# Altium PCB Core.PcbDoc (part 1 of 4)
Units mil, origin at the board's own origin, x right, y up, seen from the top; angles counter-clockwise.
Board outline 3055.22 x 2665.85 mil, 4 copper layers (Top Layer, Layer 1, Layer 2, Bottom Layer), stack 61.583 mil thick; 290 components, 231 nets, 1079 pads, 581 vias.
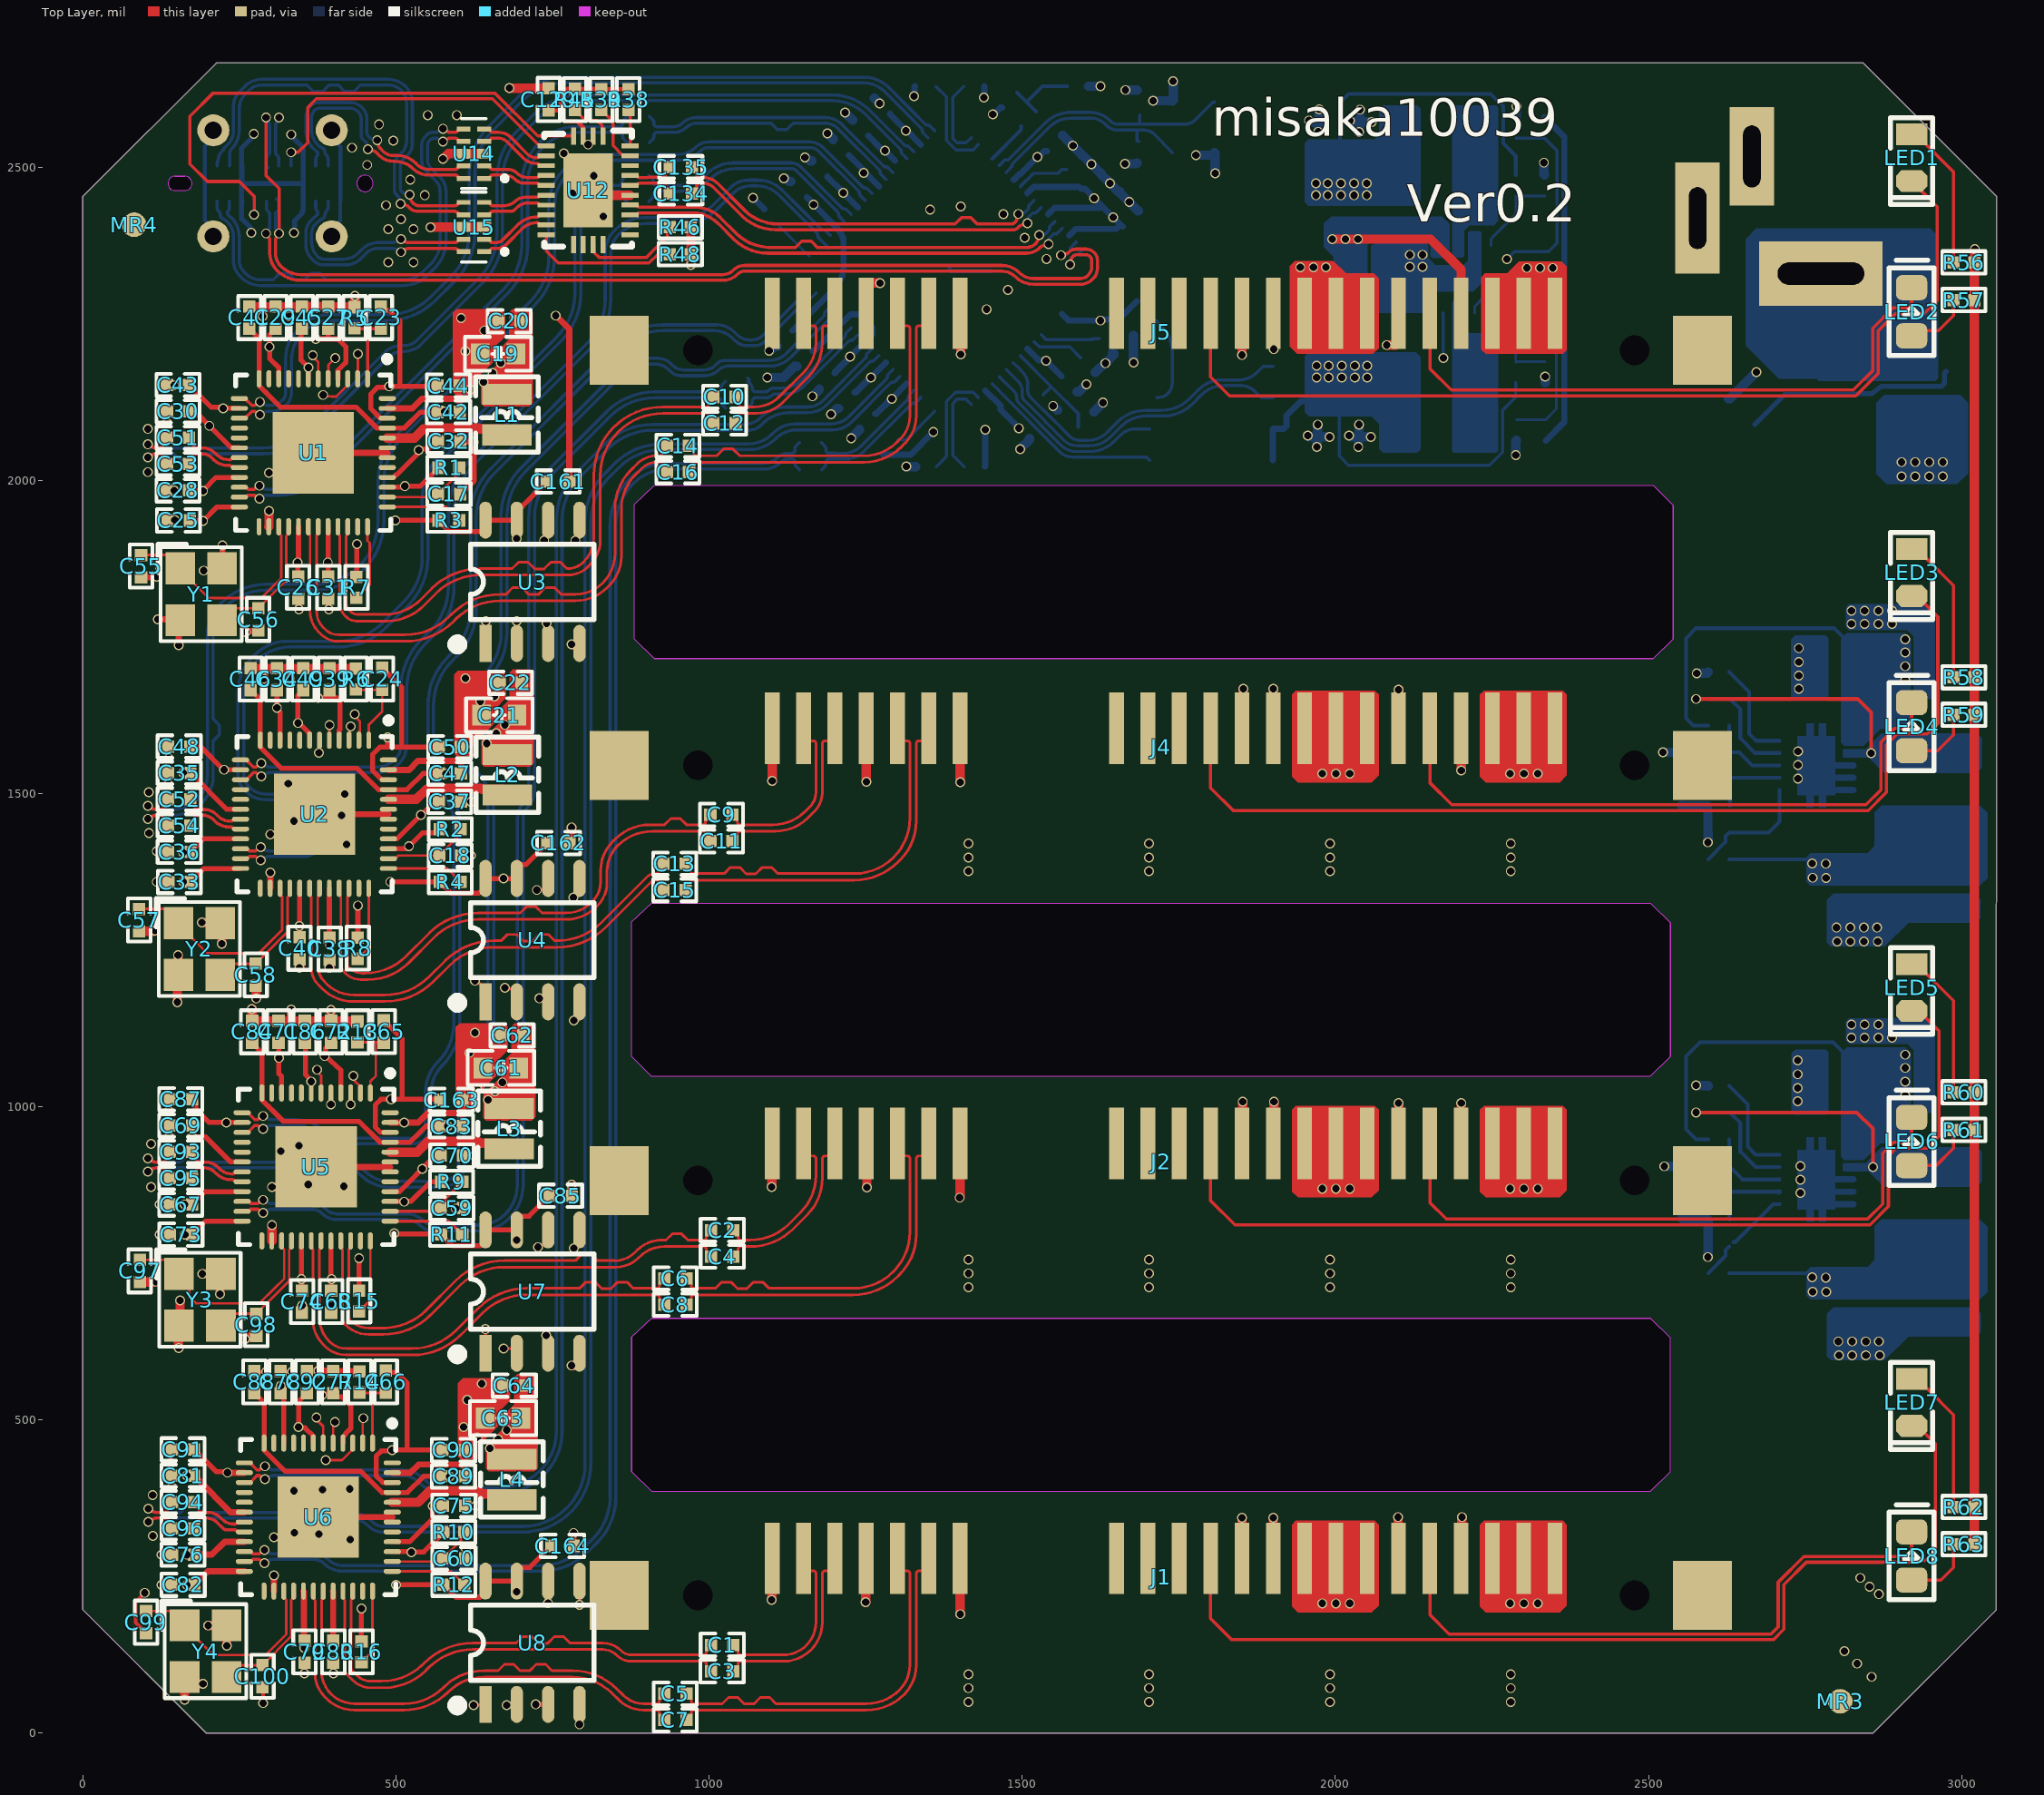
[diagram p0: Top Layer view]
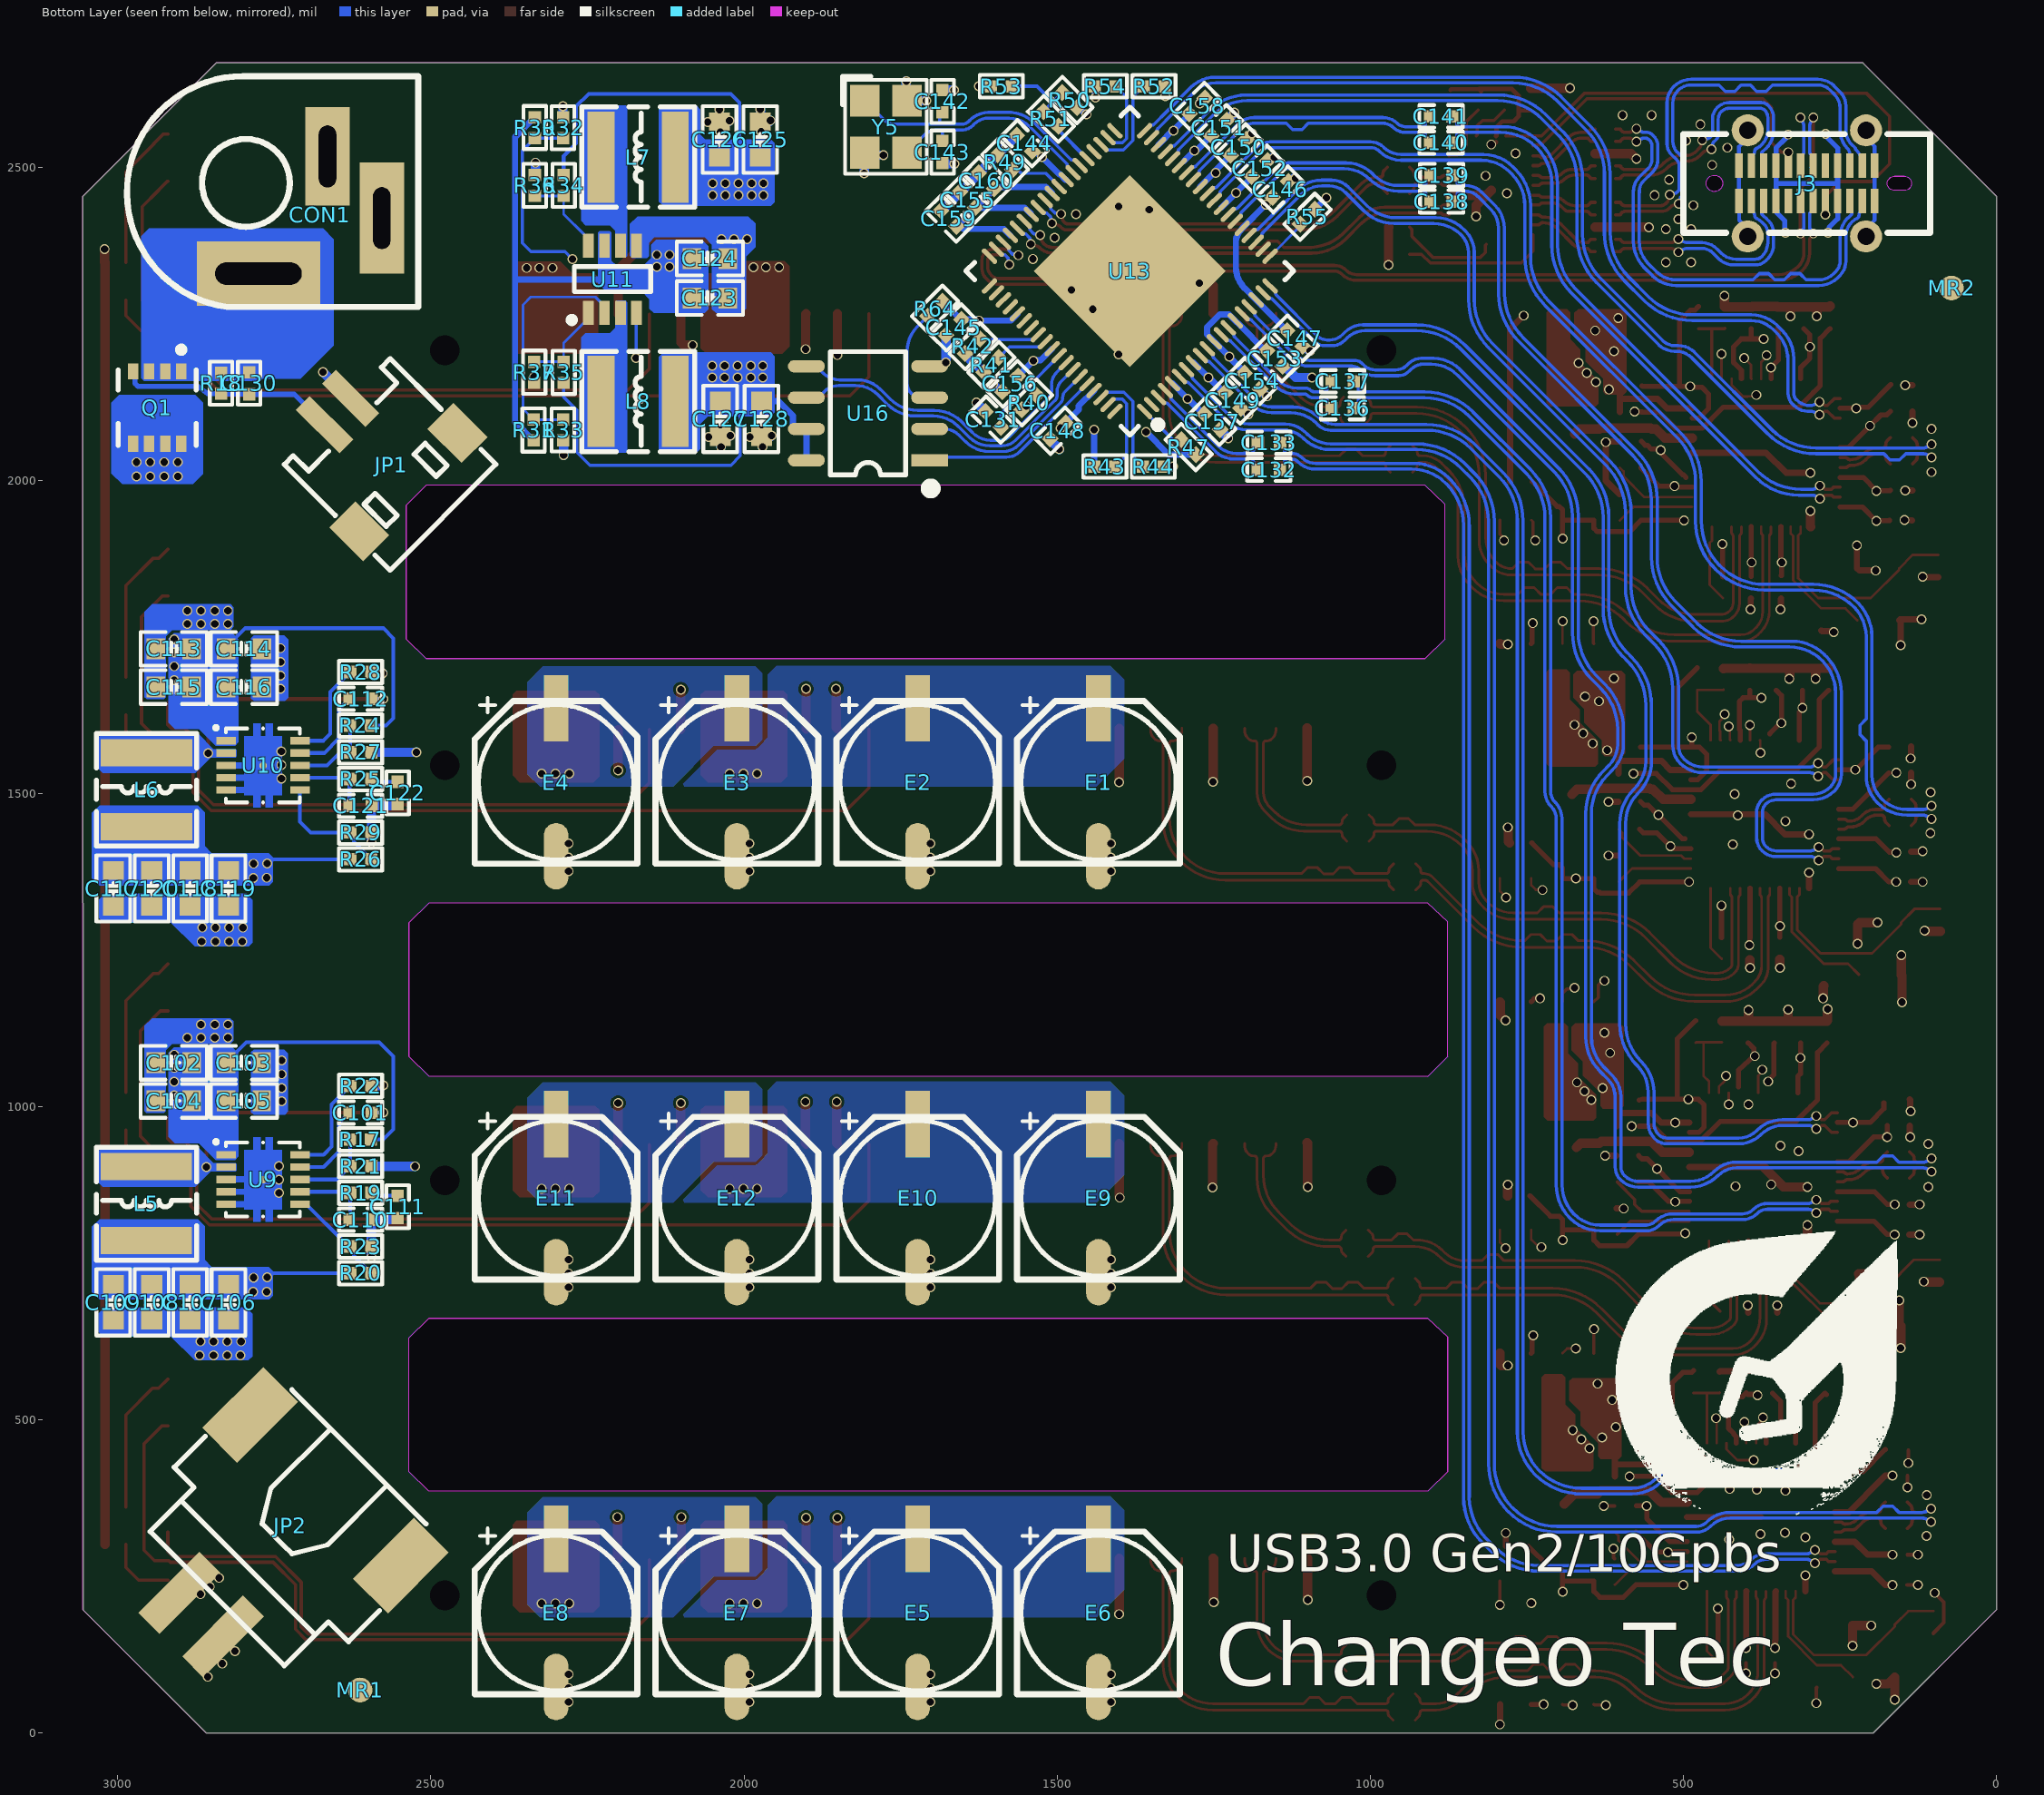
[diagram p1: Bottom Layer view, seen from below]
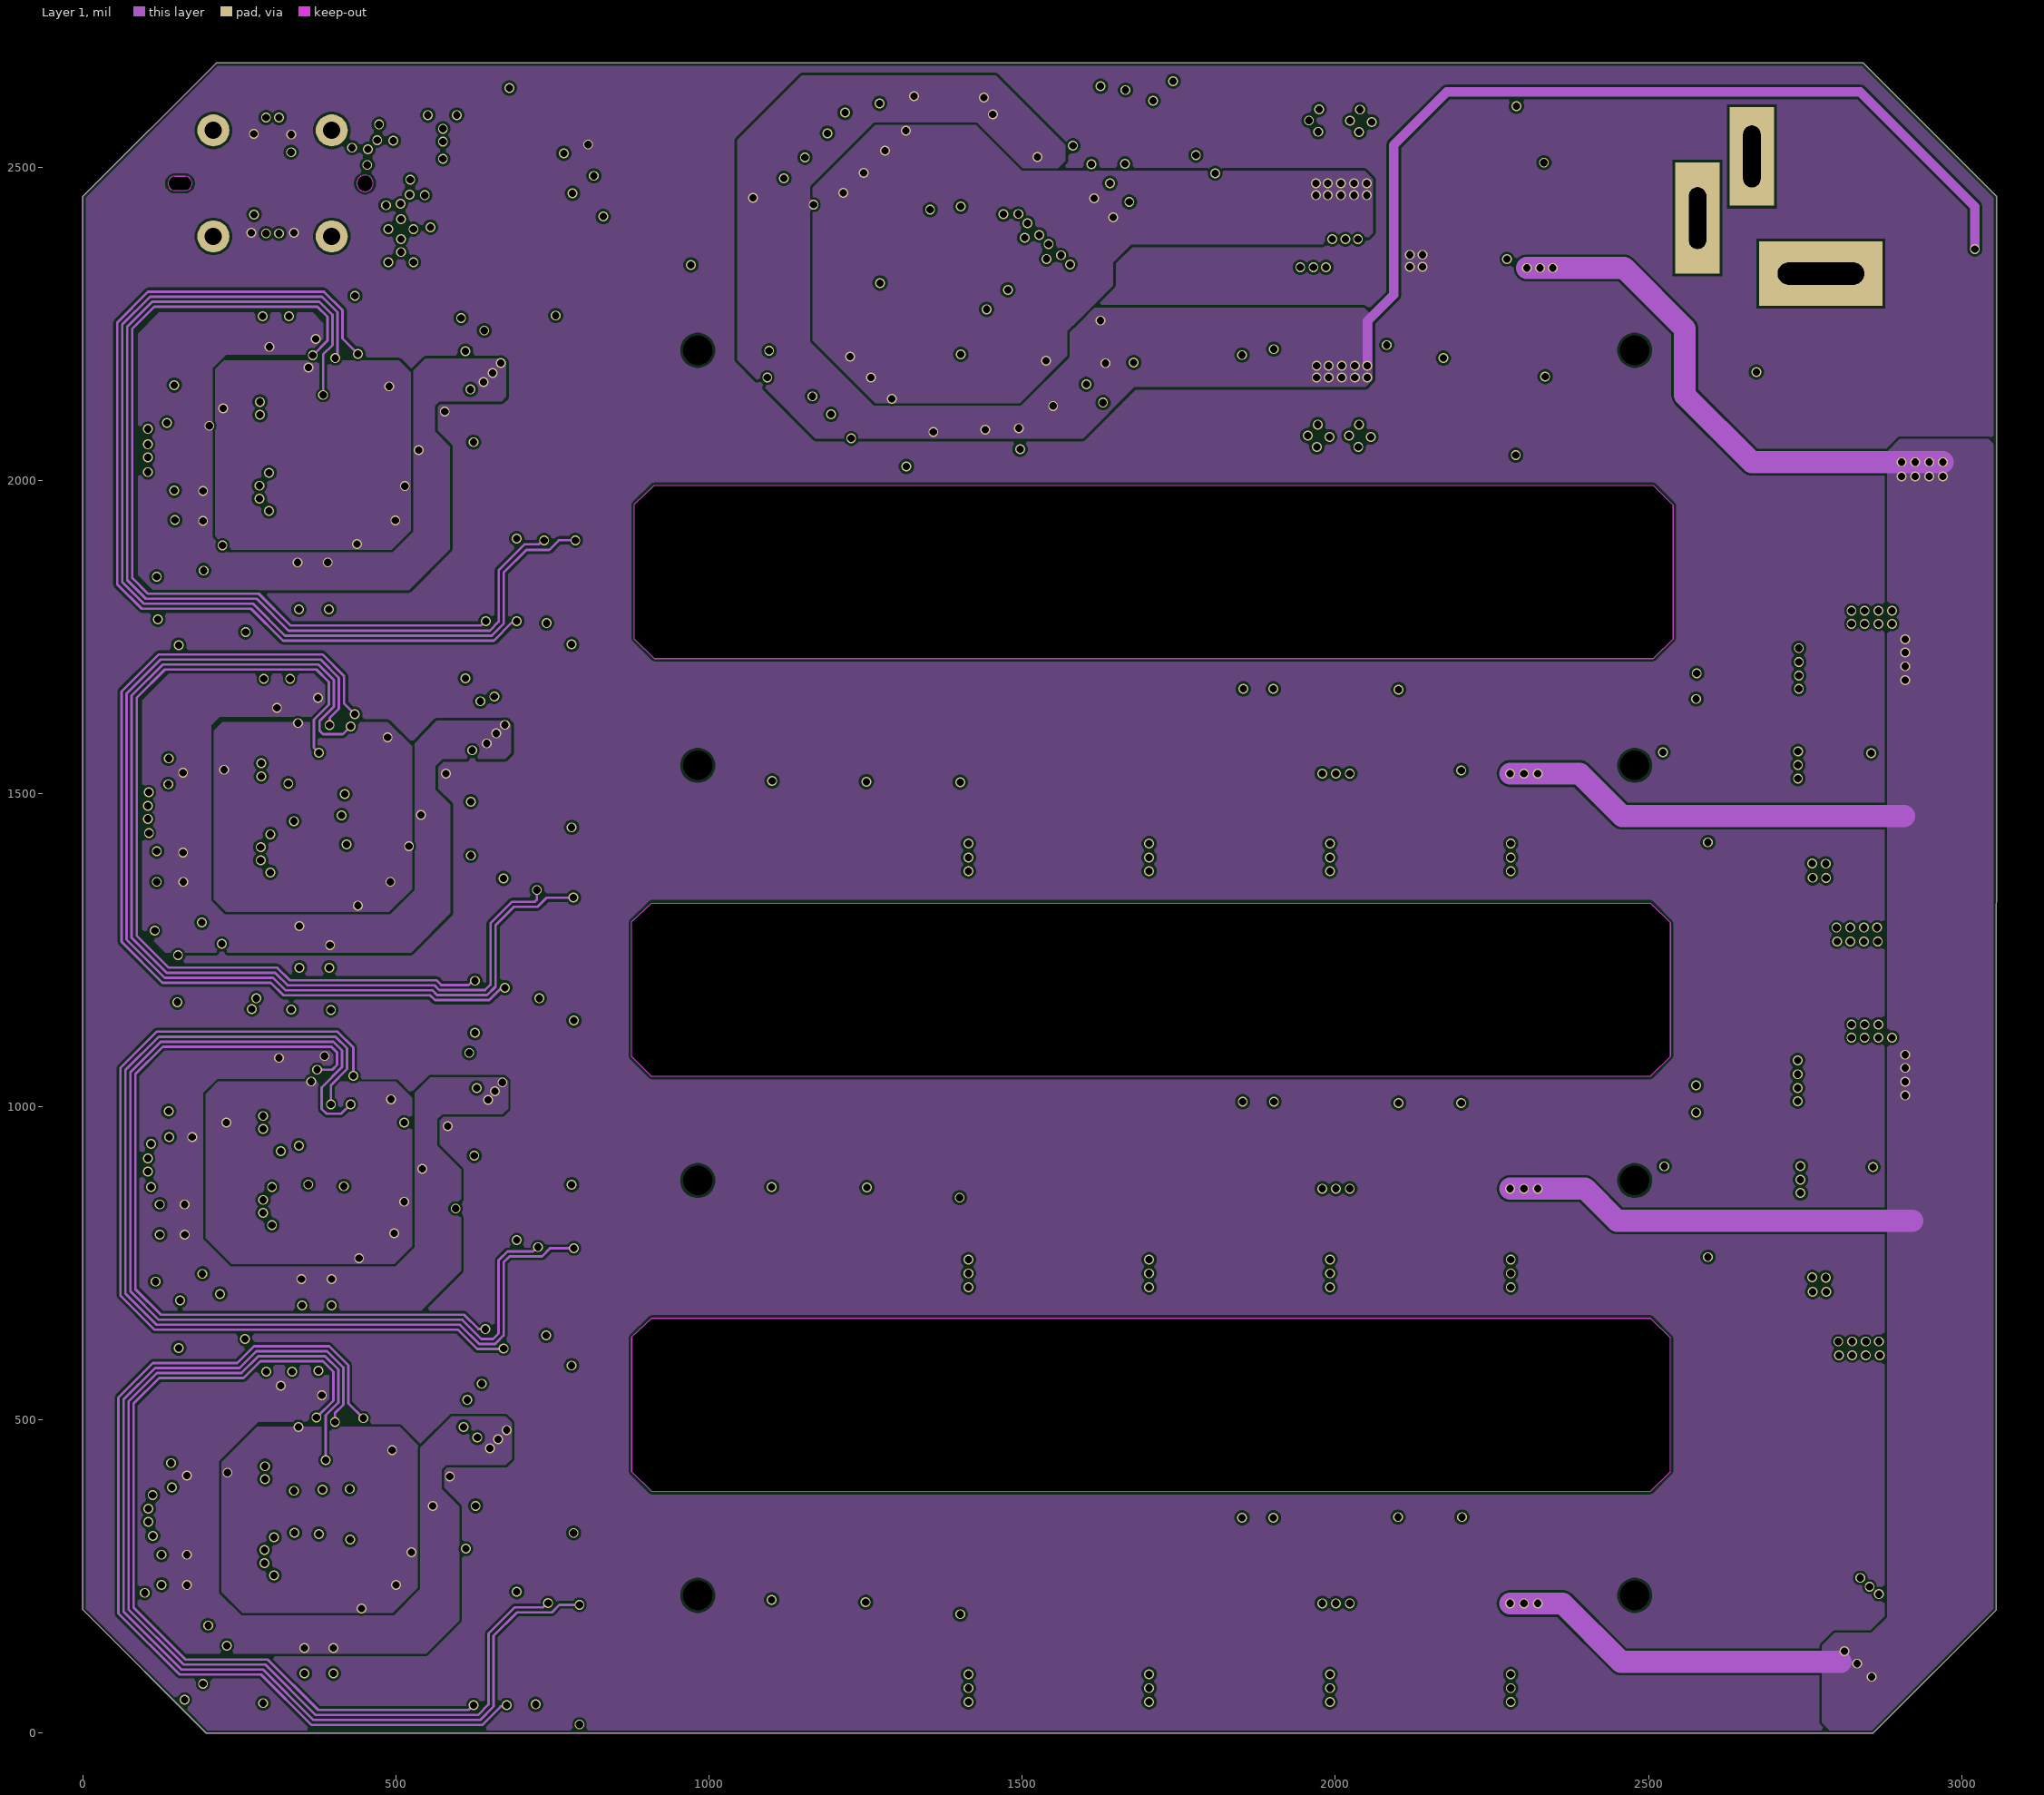
[diagram p2: Layer 1]
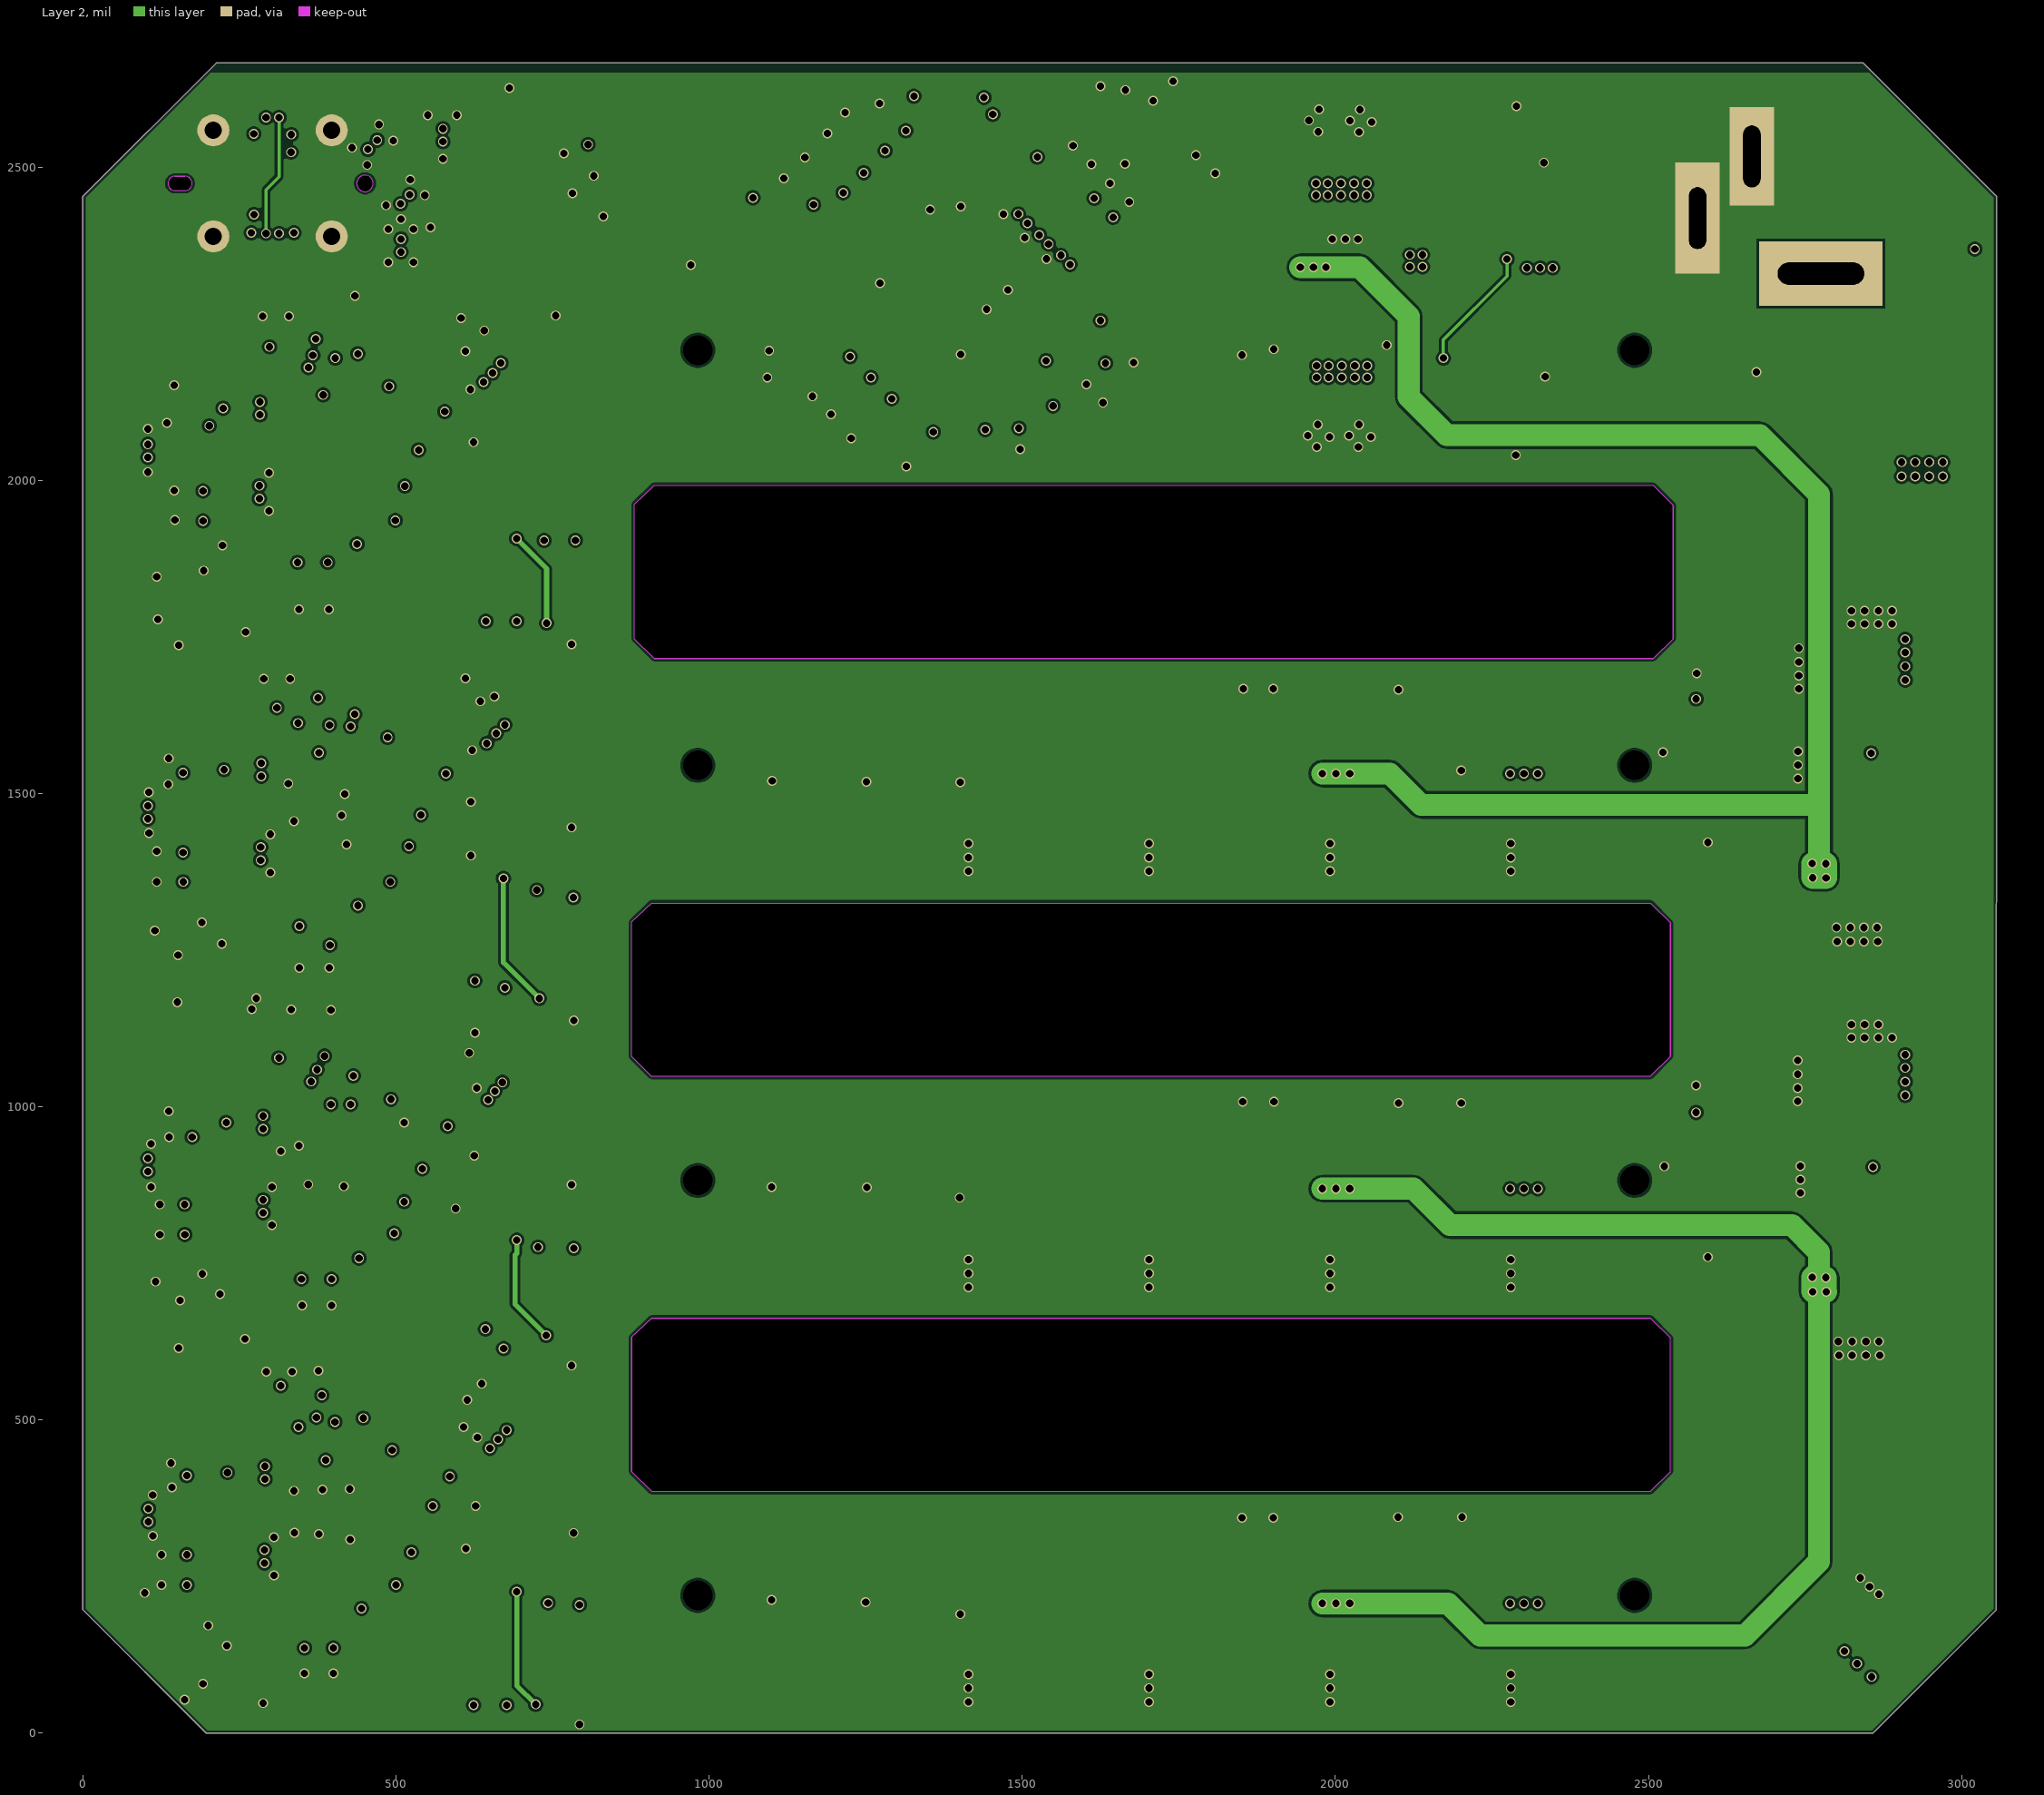
[diagram p3: Layer 2]
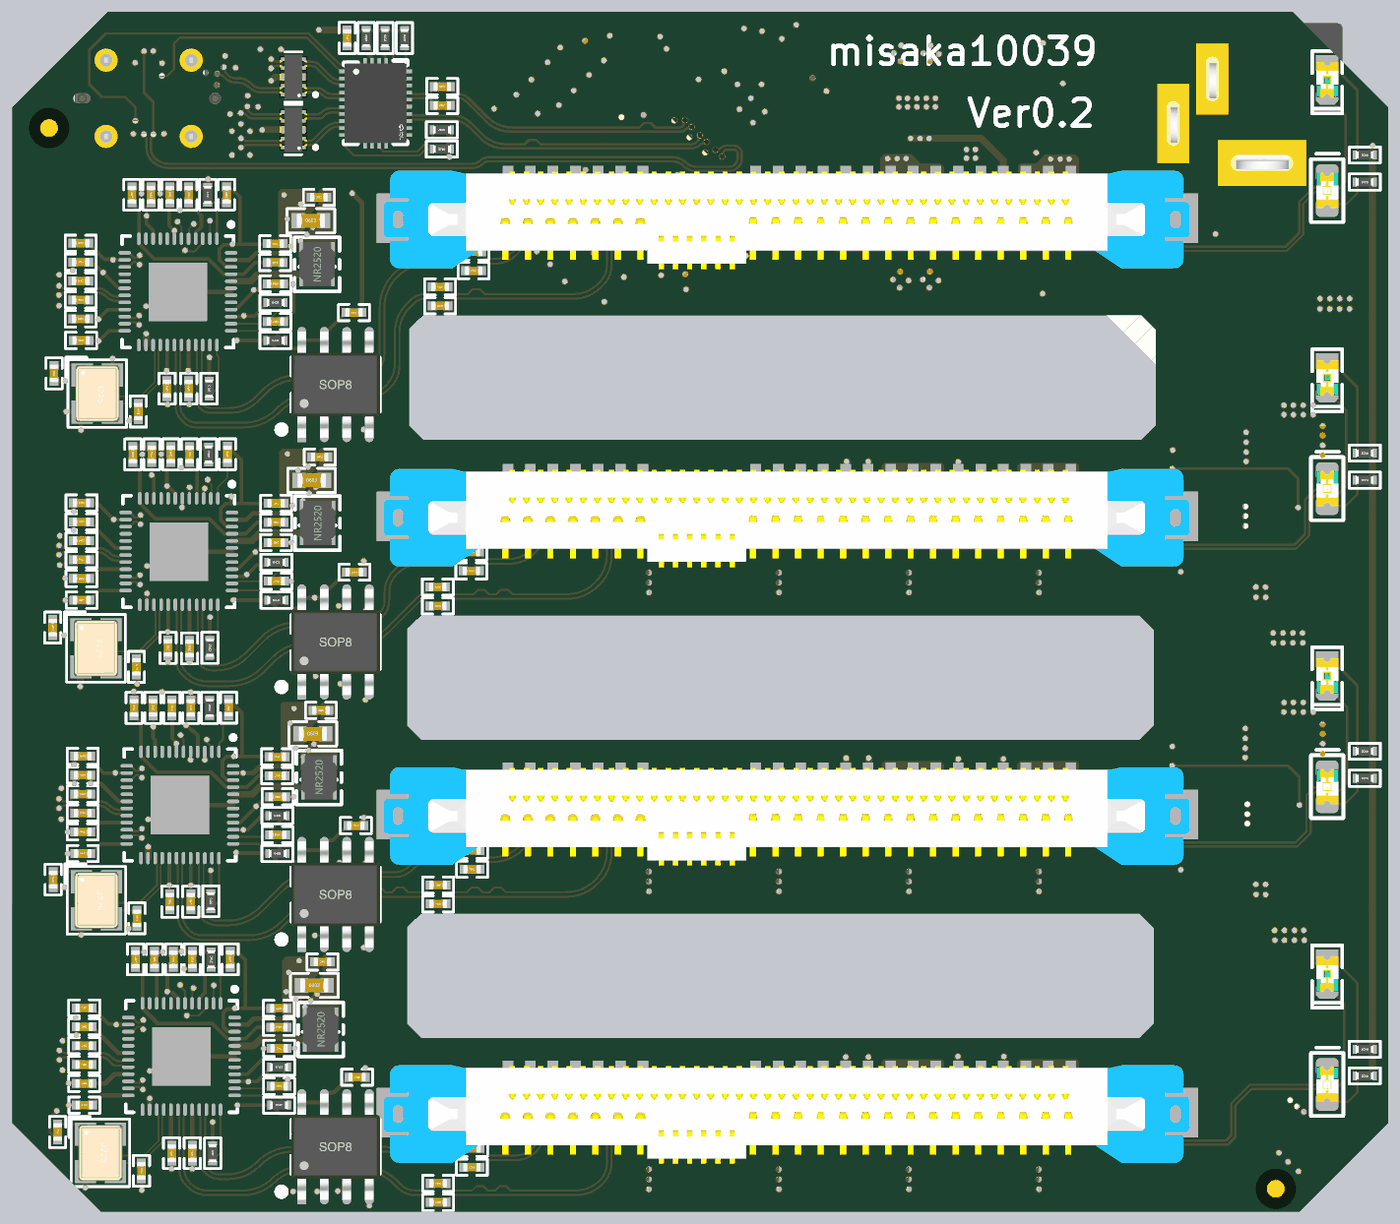
[diagram p7: 3D render of the assembled board from above, using the file's embedded part models]
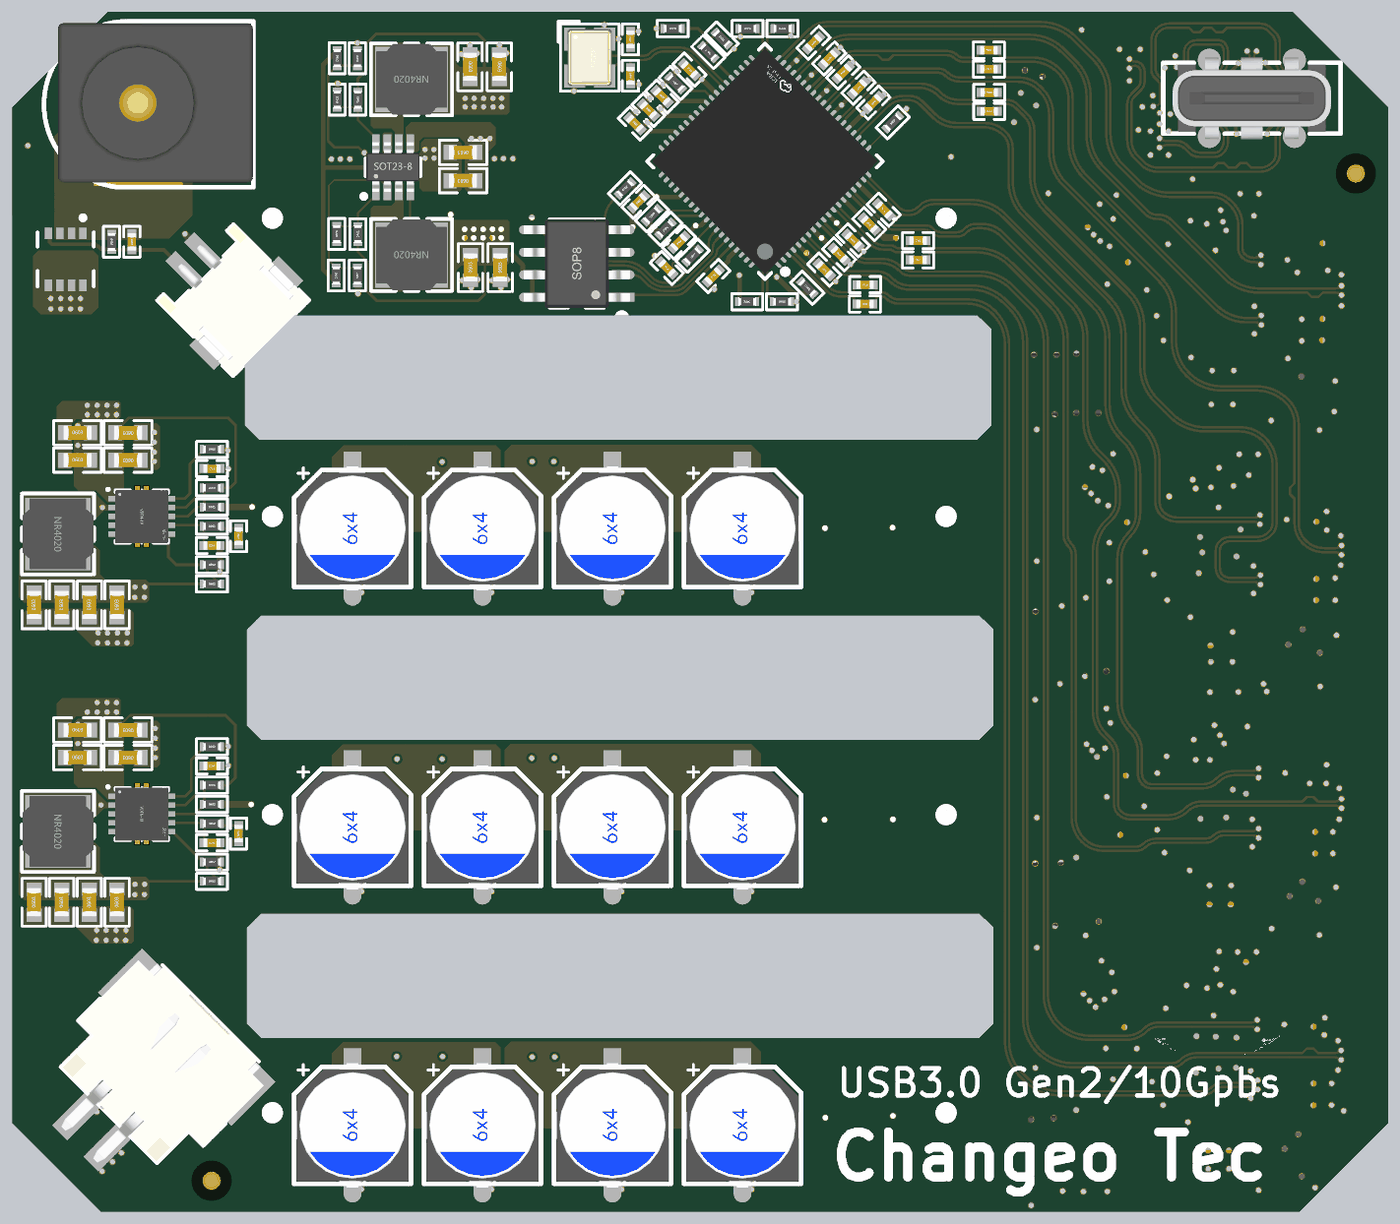
[diagram p8: 3D render of the assembled board from below, using the file's embedded part models]

## Layer stack, top to bottom
Top Solder: solder mask 0.4, Solder Resist, Dk 3.5
Top Layer: signal copper 1.378
Dielectric 2: prepreg 3.9134, PP-006, Dk 4.1
Layer 1: signal copper 0.5984
Dielectric 1: dielectric 49.8031, FR-4, Dk 4.8
Layer 2: signal copper 0.5984
Dielectric 3: prepreg 3.9134, PP-006, Dk 4.1
Bottom Layer: signal copper 1.378
Bottom Solder: solder mask 0.4, Solder Resist, Dk 3.5

## Board outline
197.1,0.25 0.25,197.1 0.31,2453.31 213.1,2666.1 213.4,2666.1 213.25,2666.1 862.53,2666.1 2842.86,2666.1 3055.47,2453.5 3055.4,197.1 2858.55,0.25
cut-out: 908.02,1048.46 876.53,1079.95 876.6,1295.03 908.1,1325.17 2503.25,1325.17 2534.75,1293.68 2534.68,1080.23 2503.18,1048.73
cut-out: 912.35,1715.56 880.85,1746.78 880.93,1961.85 912.42,1992 2507.58,1992 2539.07,1960.5 2539,1746.78 2507.5,1715.56
cut-out: 876.53,417.35 908.02,386.13 2503.18,386.13 2534.68,417.63 2534.75,631.08 2503.25,662.57 908.1,662.57 876.6,632.43

## Design rules (kind name [scope] priority, off if disabled: settings)
Clearance [All] p1: gap=4 ignorepadtopadclearanceinfootprint=FALSE except(0: Arc-Text Arc-Hole Track-Text Track-Hole SMDPad-Text SMDPad-Hole THPad-Text THPad-Hole Via-Text Via-Hole Fill-Text Fill-Hole Poly-Text Poly-Hole Region-Text Region-Hole Text-Text Text-Hole; 5: Arc-Via Track-Via Via-Via; 6: SMDPad-Via THPad-Via; 10: THPad-THPad)
ComponentClearance [All] p1: gap=0 collisioncheckmode=3 verticalgap=0 showdistances=FALSE
DiffPairsRouting "Schematic Differential Pairs Routing_1" [InNetClass('SATA')] p1: maxlimit=6 minlimit=6 mostfreqgap=6 toplayer_minwidth=4.29 toplayer_maxwidth=4.29 toplayer_prefwidth=4.29 midlayer1_minwidth=4.29 midlayer1_maxwidth=4.29 midlayer1_prefwidth=4.29 midlayer2_minwidth=4.29 midlayer2_maxwidth=4.29 midlayer2_prefwidth=4.29 bottomlayer_minwidth=4.29 bottomlayer_maxwidth=4.29 bottomlayer_prefwidth=4.29 maxuncoupledlength=5
DiffPairsRouting "Schematic Differential Pairs Routing_46" [InNetClass('USB')] p2: maxlimit=4 minlimit=4 mostfreqgap=4 toplayer_minwidth=5.15 toplayer_maxwidth=5.15 toplayer_prefwidth=5.15 midlayer1_minwidth=5.15 midlayer1_maxwidth=5.15 midlayer1_prefwidth=5.15 midlayer2_minwidth=5.15 midlayer2_maxwidth=5.15 midlayer2_prefwidth=5.15 bottomlayer_minwidth=5.15 bottomlayer_maxwidth=5.15 bottomlayer_prefwidth=5.15 maxuncoupledlength=5
DiffPairsRouting [All] p3: maxlimit=10 minlimit=10 mostfreqgap=10 toplayer_minwidth=15 toplayer_maxwidth=15 toplayer_prefwidth=15 midlayer1_minwidth=15 midlayer1_maxwidth=15 midlayer1_prefwidth=15 midlayer2_minwidth=15 midlayer2_maxwidth=15 midlayer2_prefwidth=15 bottomlayer_minwidth=15 bottomlayer_maxwidth=15 bottomlayer_prefwidth=15 maxuncoupledlength=500
MinimumSolderMaskSliver [All] p1: minsoldermaskwidth=0
NetAntennae [All] p1 off: netantennaetolerance=3.94
PlaneClearance [All] p1: clearance=8
PlaneConnect [All] p1: planeconnectstyle=Direct reliefexpansion=20 reliefentries=4 reliefconductorwidth=10 reliefairgap=10
PolygonConnect [All] p1: connectstyle=Direct reliefconductorwidth=10 reliefentries=4 polygonreliefangle="90 Angle" airgapwidth=10
RoutingVias [All] p1: holewidth=11.81 width=15.75 viastyle="Through Hole" minholewidth=11.81 minwidth=15.75 maxholewidth=19.68 maxwidth=23.62
SilkToSolderMaskClearance [IsPad] p1: minsilkscreentomaskgap=0 clearancetoexposedcopper=TRUE
SolderMaskExpansion SolderMaskExpansion_1 [IsPad] p1: expansion=1.5 istentingtop=FALSE
SolderMaskExpansion [IsVia] p2: expansion=4 istentingtop=TRUE
Width "Schematic Width Constraint" [InNet('VCC5V-A')] p1: maxlimit=50 minlimit=6 preferedwidth=10 toplayer_prefwidth=8 bottomlayer_prefwidth=8 minimp=50.000000 maximp=50.000000 favimp=50.000000
Width [All] p2: maxlimit=100 minlimit=2 preferedwidth=4
23 further rules are at their usual default settings.

## Classes and differential pairs
net class PWR: GND VBUS VCC1V0 VCC1V2-A VCC1V2-B VCC1V2-C VCC1V2-D VCC3V3 VCC3V3-A VCC3V3-B VCC3V3-C VCC3V3-D VCC5V-A VCC5V-B VCC12V VIN
net class USB: cap_IN_SSRX1_N cap_IN_SSRX1_P cap_IN_SSRX2_N cap_IN_SSRX2_P cap_IN_SSTX1_N cap_IN_SSTX1_P cap_IN_SSTX2_N cap_IN_SSTX2_P cap_SSRX1_N cap_SSRX1_P cap_SSRX2_N cap_SSRX2_P cap_SSRX3_N cap_SSRX3_P cap_SSRX4_N cap_SSRX4_P cap_SSTX1_N cap_SSTX1_P cap_SSTX2_N cap_SSTX2_P cap_SSTX3_N cap_SSTX3_P cap_SSTX4_N cap_SSTX4_P cap_SSTX_N cap_SSTX_P HSD1_N HSD1_P HSD2_N HSD2_P HSD3_N HSD3_P HSD4_N HSD4_P IN_CC1 IN_CC2 IN_SSRX1_N IN_SSRX1_P IN_SSRX2_N IN_SSRX2_P IN_SSTX1_N IN_SSTX1_P IN_SSTX2_N IN_SSTX2_P SSRX1_N SSRX1_P SSRX2_N SSRX2_P SSRX3_N SSRX3_P SSRX4_N SSRX4_P SSRX_N SSRX_P SSTX1_N SSTX1_P SSTX2_N SSTX2_P SSTX3_N SSTX3_P SSTX4_N SSTX4_P SSTX_N SSTX_P USBD_N USBD_P
net class Sata: cap_RX1_N cap_RX1_P cap_RX2_N cap_RX2_P cap_RX3_N cap_RX3_P cap_RX4_N cap_RX4_P cap_TX1_N cap_TX1_P cap_TX2_N cap_TX2_P cap_TX3_N cap_TX3_P cap_TX4_N cap_TX4_P RX1_N RX1_P RX2_N RX2_P RX3_N RX3_P RX4_N RX4_P TX1_N TX1_P TX2_N TX2_P TX3_N TX3_P TX4_N TX4_P
component class Vl822: C129 C131 C132 C133 C134 C135 C136 C137 C138 C139 C140 C141 C142 C143 C144 C145 C146 C147 C148 C149 C150 C151 C152 C153 C154 C155 C156 C157 C158 C159 C160 R38 R39 R40 R41 R42 R43 R44 R45 R46 R47 R48 R49 R50 R51 R52 R53 R54 R55 R64 U12 U13 U14 U15 U16 Y5
component class Pwr: C101 C102 C103 C104 C105 C106 C107 C108 C109 C110 C111 C112 C113 C114 C115 C116 C117 C118 C119 C120 C121 C122 C123 C124 C125 C126 C127 C128 C130 E1 E2 E3 E4 E5 E6 E7 E8 E9 E10 E11 E12 JP1 JP2 L5 L6 L7 L8 Q1 R17 R18 R19 R20 R21 R22 R23 R24 R25 R26 R27 R28 R29 R30 R31 R32 R33 R34 R35 R36 R37 U9 U10 U11
component class jms578: C17 C18 C19 C20 C21 C22 C23 C24 C25 C26 C27 C28 C29 C30 C31 C32 C33 C34 C35 C36 C37 C38 C39 C40 C41 C42 C43 C44 C45 C46 C47 C48 C49 C50 C51 C52 C53 C54 C55 C56 C57 C58 C59 C60 C61 C62 C63 C64 C65 C66 C67 C68 C69 C70 C71 C72 C73 C74 C75 C76 C77 C78 C79 C80 C81 C82 C83 C84 C85 C86 C87 C88 C89 C90 C91 C92 C93 C94 C95 C96 C97 C98 C99 C100 C161 C162 C163 C164 L1 L2 L3 L4 R1 R2 R3 R4 R5 R6 R7 R8 R9 R10 R11 R12 R13 R14 R15 R16 U1 U2 U3 U4 U5 U6 U7 U8 Y1 Y2 Y3 Y4
component class Connector: C1 C2 C3 C4 C5 C6 C7 C8 C9 C10 C11 C12 C13 C14 C15 C16 CON1 J1 J2 J3 J4 J5 LED1 LED2 LED3 LED4 LED5 LED6 LED7 LED8 MR1 MR2 MR3 MR4 R56 R57 R58 R59 R60 R61 R62 R63
differential pair cap_SSRX2: +cap_SSRX2_P -cap_SSRX2_N
differential pair cap_SSTX: +cap_SSTX_P -cap_SSTX_N
differential pair cap_IN_SSTX2: +cap_IN_SSTX2_P -cap_IN_SSTX2_N
differential pair cap_IN_SSTX1: +cap_IN_SSTX1_P -cap_IN_SSTX1_N
differential pair cap_IN_SSRX2: +cap_IN_SSRX2_P -cap_IN_SSRX2_N
differential pair cap_IN_SSRX1: +cap_IN_SSRX1_P -cap_IN_SSRX1_N
differential pair cap_SSRX4: +cap_SSRX1_P -cap_SSRX1_N
differential pair cap_SSRX3: +cap_SSRX3_P -cap_SSRX3_N
differential pair cap_SSRX1: +cap_SSRX4_P -cap_SSRX4_N
differential pair SSTX4: +SSTX4_P -SSTX4_N
differential pair SSTX3: +SSTX3_P -SSTX3_N
differential pair SSTX2: +SSTX2_P -SSTX2_N
differential pair SSTX1: +SSTX1_P -SSTX1_N
differential pair SSRX4: +SSRX4_P -SSRX4_N
differential pair SSRX3: +SSRX3_P -SSRX3_N
differential pair SSRX2: +SSRX2_P -SSRX2_N
differential pair SSRX1: +SSRX1_P -SSRX1_N
differential pair HSD4: +HSD4_P -HSD4_N
differential pair HSD3: +HSD3_P -HSD3_N
differential pair HSD2: +HSD2_P -HSD2_N
differential pair HSD1: +HSD1_P -HSD1_N
differential pair cap_SSTX4: +cap_SSTX4_P -cap_SSTX4_N
differential pair cap_SSTX3: +cap_SSTX3_P -cap_SSTX3_N
differential pair cap_SSTX2: +cap_SSTX2_P -cap_SSTX2_N
differential pair cap_SSTX1: +cap_SSTX1_P -cap_SSTX1_N
differential pair SSTX: +SSTX_P -SSTX_N
differential pair SSRX: +SSRX_P -SSRX_N
differential pair cap_TX2: +cap_TX2_P -cap_TX2_N
differential pair USBD: +USBD_P -USBD_N
differential pair IN_SSTX2: +IN_SSTX2_P -IN_SSTX2_N
differential pair IN_SSTX1: +IN_SSTX1_P -IN_SSTX1_N
differential pair IN_SSRX2: +IN_SSRX2_P -IN_SSRX2_N
differential pair IN_SSRX1: +IN_SSRX1_P -IN_SSRX1_N
differential pair cap_TX4: +cap_TX4_P -cap_TX4_N
differential pair cap_TX3: +cap_TX3_P -cap_TX3_N
differential pair cap_TX1: +cap_TX1_P -cap_TX1_N
differential pair cap_RX4: +cap_RX4_P -cap_RX4_N
differential pair cap_RX3: +cap_RX3_P -cap_RX3_N
differential pair cap_RX2: +cap_RX2_P -cap_RX2_N
differential pair cap_RX1: +cap_RX1_P -cap_RX1_N
differential pair TX4: +TX4_P -TX4_N
differential pair TX3: +TX3_P -TX3_N
differential pair TX2: +TX2_P -TX2_N
differential pair TX1: +TX1_P -TX1_N
differential pair RX4: +RX4_P -RX4_N
differential pair RX3: +RX3_P -RX3_N
differential pair RX2: +RX2_P -RX2_N
differential pair RX1: +RX1_P -RX1_N

## Components (designator, comment, footprint, x,y, rotation, side; value= is the part's Value field where it differs from the comment)
C1 "10nF 6.3V" C0402_L 1021,141 r180 top
C2 "10nF 6.3V" C0402_L 1021,803 r180 top
C3 "10nF 6.3V" C0402_L 1020.72,99 r180 top
C4 "10nF 6.3V" C0402_L 1021,761 r180 top
C5 "10nF 6.3V" C0402_L 946,63 r180 top
C6 "10nF 6.3V" C0402_L 946,726 r180 top
C7 "10nF 6.3V" C0402_L 946,21 r180 top
C8 "10nF 6.3V" C0402_L 946,684 r180 top
C9 "10nF 6.3V" C0402_L 1019.72,1466 r180 top
C10 "10nF 6.3V" C0402_L 1024.72,2133 r180 top
C11 "10nF 6.3V" C0402_L 1019.72,1424 r180 top
C12 "10nF 6.3V" C0402_L 1024.72,2091 r180 top
C13 "10nF 6.3V" C0402_L 945,1388 r180 top
C14 "10nF 6.3V" C0402_L 950.28,2055 r180 top
C15 "10nF 6.3V" C0402_L 945,1346 r180 top
C16 "10nF 6.3V" C0402_L 950.28,2013 r180 top
C17 "1uF 10V" C0402_L 584.72,1978 r180 top
C18 "1uF 10V" C0402_L 586.72,1401 r180 top
C19 "10uF 6.3V" C0603_L 663,2202 r0 top
C20 "100nF 6.3V" C0402_L 681,2254 r0 top
C21 "10uF 6.3V" C0603_L 665,1625 r0 top
C22 "100nF 6.3V" C0402_L 683,1677 r0 top
C23 "1uF 10V" C0402_L 476,2259.72 r90 top
C24 "1uF 10V" C0402_L 478,1683 r90 top
C25 "100nF 6.3V" C0402_L 153,1936 r0 top
C26 "100nF 6.3V" C0402_L 344,1829 r90 top
C27 "100nF 6.3V" C0402_L 392,2259.72 r270 top
C28 "100nF 6.3V" C0402_L 152,1984 r0 top
C29 "100nF 6.3V" C0402_L 308,2259.72 r270 top
C30 "100nF 6.3V" C0402_L 152,2110 r0 top
C31 "100nF 6.3V" C0402_L 392,1829 r90 top
C32 "100nF 6.3V" C0402_L 584.72,2062 r180 top
C33 "100nF 6.3V" C0402_L 154.28,1359 r0 top
C34 "100nF 6.3V" C0402_L 310,1682.72 r270 top
C35 "100nF 6.3V" C0402_L 154,1533 r0 top
C36 "100nF 6.3V" C0402_L 154,1407 r0 top
C37 "100nF 6.3V" C0402_L 586,1487 r180 top
C38 "100nF 6.3V" C0402_L 394,1252 r90 top
C39 "100nF 6.3V" C0402_L 394,1682.72 r270 top
C40 "100nF 6.3V" C0402_L 346,1253 r90 top
C41 "100nF 6.3V" C0402_L 266,2259.72 r270 top
C42 "100nF 6.3V" C0402_L 584,2109 r180 top
C43 "100nF 6.3V" C0402_L 152,2152 r0 top
C44 "100nF 6.3V" C0402_L 584,2151 r180 top
C45 "100nF 6.3V" C0402_L 350,2259.72 r270 top
C46 "100nF 6.3V" C0402_L 268,1682.72 r270 top
C47 "100nF 6.3V" C0402_L 586,1532 r180 top
C48 "100nF 6.3V" C0402_L 154,1575 r0 top
C49 "100nF 6.3V" C0402_L 352,1682.72 r270 top
C50 "100nF 6.3V" C0402_L 586,1574 r180 top
C51 "100nF 6.3V" C0402_L 152,2068 r0 top
C52 "100nF 6.3V" C0402_L 154,1491 r0 top
C53 "100nF 6.3V" C0402_L 152,2026 r0 top
C54 "100nF 6.3V" C0402_L 154,1449 r0 top
C55 "33pF/16V" C0402_L 93,1863 r270 top
C56 "33pF/16V" C0402_L 280,1778 r270 top
C57 "33pF/16V" C0402_L 90,1298 r270 top
C58 "33pF/16V" C0402_L 276,1210.72 r270 top
C59 "1uF 10V" C0402_L 589.26,838 r180 top
C60 "1uF 10V" C0402_L 592.72,279 r180 top
C61 "10uF 6.3V" C0603_L 667.54,1062 r0 top
C62 "100nF 6.3V" C0402_L 685.54,1114 r0 top
C63 "10uF 6.3V" C0603_L 671,503 r0 top
C64 "100nF 6.3V" C0402_L 689,555 r0 top
C65 "1uF 10V" C0402_L 480.54,1120 r90 top
C66 "1uF 10V" C0402_L 484,561 r90 top
C67 "100nF 6.3V" C0402_L 156.54,844 r0 top
C68 "100nF 6.3V" C0402_L 396.54,689 r90 top
C69 "100nF 6.3V" C0402_L 156.54,970 r0 top
C70 "100nF 6.3V" C0402_L 589.26,922 r180 top
C71 "100nF 6.3V" C0402_L 312.54,1119.72 r270 top
C72 "100nF 6.3V" C0402_L 396.54,1119.72 r270 top
C73 "100nF 6.3V" C0402_L 156.83,796 r0 top
C74 "100nF 6.3V" C0402_L 350.09,689 r90 top
C75 "100nF 6.3V" C0402_L 592.72,363 r180 top
C76 "100nF 6.3V" C0402_L 160,285 r0 top
C77 "100nF 6.3V" C0402_L 400,560.72 r270 top
C78 "100nF 6.3V" C0402_L 316,560.72 r270 top
C79 "100nF 6.3V" C0402_L 354,130 r90 top
C80 "100nF 6.3V" C0402_L 400,130 r90 top
C81 "100nF 6.3V" C0402_L 160,411 r0 top
C82 "100nF 6.3V" C0402_L 160.28,237 r0 top
C83 "100nF 6.3V" C0402_L 588.54,969 r180 top
C84 "100nF 6.3V" C0402_L 270.54,1119.72 r270 top
C85 "100nF 6.3V" C0402_L 763,858 r180 top
C86 "100nF 6.3V" C0402_L 354.54,1119.72 r270 top
C87 "100nF 6.3V" C0402_L 156.54,1012 r0 top
C88 "100nF 6.3V" C0402_L 274,560.72 r270 top
C89 "100nF 6.3V" C0402_L 592,410 r180 top
C90 "100nF 6.3V" C0402_L 592,452 r180 top
C91 "100nF 6.3V" C0402_L 160,453 r0 top
C92 "100nF 6.3V" C0402_L 358,560.72 r270 top
C93 "100nF 6.3V" C0402_L 156.54,928 r0 top
C94 "100nF 6.3V" C0402_L 160,369 r0 top
C95 "100nF 6.3V" C0402_L 156.54,886 r0 top
C96 "100nF 6.3V" C0402_L 160,327 r0 top
C97 "33pF/16V" C0402_L 91,738 r270 top
C98 "33pF/16V" C0402_L 277,652 r270 top
C99 "33pF/16V" C0402_L 101,177.28 r270 top
C100 "33pF/16V" C0402_L 287,91 r270 top
C101 "100nF/25V" C0402_L 2612.19,990.64 r0 bottom
C102 "10uF/25V" C0603_L 2910.52,1070.36 r180 bottom
C103 "10uF/25V" C0603_L 2798.52,1070.36 r0 bottom
C104 "1uF/25V" C0603_L 2910.52,1009.36 r180 bottom
C105 "3.3nF/25V" C0603_L 2798.52,1009.36 r0 bottom
C106 "22uF/16V" C0603_L 2823.06,687.81 r90 bottom
C107 "22uF/16V" C0603_L 2884.39,687.81 r90 bottom
C108 "22uF/16V" C0603_L 2945.73,687.81 r90 bottom
C109 "22uF/16V" C0603_L 3007.06,687.81 r90 bottom
C110 "68pF/25V" C0402_L 2612.19,819.78 r0 bottom
C111 "560pF/25V" C0402_L 2553.06,840.36 r90 bottom
C112 "100nF/25V" C0402_L 2612.13,1651.29 r0 bottom
C113 "10uF/25V" C0603_L 2910.46,1731 r180 bottom
C114 "10uF/25V" C0603_L 2798.46,1731 r0 bottom
C115 "1uF/25V" C0603_L 2910.46,1670 r180 bottom
C116 "3.3nF/25V" C0603_L 2798.46,1670 r0 bottom
C117 "22uF/16V" C0603_L 3007,1348.46 r90 bottom
C118 "22uF/16V" C0603_L 2884.33,1348.46 r90 bottom
C119 "22uF/16V" C0603_L 2823,1348.46 r90 bottom
C120 "22uF/16V" C0603_L 2945.67,1348.46 r90 bottom
C121 "68pF/25V" C0402_L 2612.13,1480.43 r0 bottom
C122 "560pF/25V" C0402_L 2553,1501 r90 bottom
C123 "22uF 10V" C0603_L 2054.46,2291 r0 bottom
C124 "22uF 10V" C0603_L 2054.46,2354 r0 bottom
C125 "4.7uF 6.3V" C0603_L 1974,2544 r270 bottom
C126 "22uF 6.3V" C0603_L 2039,2544 r270 bottom
C127 "22uF 6.3V" C0603_L 2038,2098 r90 bottom
C128 "4.7uF 6.3V" C0603_L 1972,2098 r90 bottom
C129 "100nF 10V" C0402_L 744,2608 r270 top
C130 "100nF/25V" C0402_L 2790,2155 r270 bottom
C131 "100nF 6.3V" C0402_L 1602,2097 r45 bottom
C132 "100nF 6.3V" C0402_L 1162,2017 r0 bottom
C133 "100nF 6.3V" C0402_L 1161.72,2060 r0 bottom
C134 "100nF 6.3V" C0402_L 955,2458 r0 top
C135 "100nF 6.3V" C0402_L 955,2500 r0 top
C136 "100nF 6.3V" C0402_L 1044.28,2115 r0 bottom
C137 "100nF 6.3V" C0402_L 1044,2158 r0 bottom
C138 "100nF 6.3V" C0402_L 886,2445 r0 bottom
C139 "100nF 6.3V" C0402_L 886,2487 r0 bottom
C140 "100nF 6.3V" C0402_L 887,2539 r0 bottom
C141 "100nF 6.3V" C0402_L 887,2581 r0 bottom
C142 "22pF/16V" C0402_L 1683,2605 r90 bottom
C143 "22pF/16V" C0402_L 1683,2524 r270 bottom
C144 "100nF 6.3V" C0402_L 1552,2538 r225 bottom
C145 "100nF 6.3V" C0402_L 1665,2244 r135 bottom
C146 "100nF 6.3V" C0402_L 1143.47,2464.53 r315 bottom
C147 "100nF 6.3V" C0402_L 1120.47,2226.47 r45 bottom
C148 "100nF 6.3V" C0402_L 1499,2079 r135 bottom
C149 "100nF 6.3V" C0402_L 1219.47,2127.47 r45 bottom
C150 "100nF 6.3V" C0402_L 1210.47,2531.53 r315 bottom
C151 "100nF 6.3V" C0402_L 1241.47,2562.53 r315 bottom
C152 "100nF 6.3V" C0402_L 1176.47,2497.53 r315 bottom
C153 "100nF 6.3V" C0402_L 1152.47,2194.47 r45 bottom
C154 "100nF 6.3V" C0402_L 1188.47,2158.47 r45 bottom
C155 "100nF 6.3V" C0402_L 1643,2448 r225 bottom
C156 "100nF 6.3V" C0402_L 1575,2154 r135 bottom
C157 "100nF 6.3V" C0402_L 1252.47,2093.47 r45 bottom
C158 "100nF 6.3V" C0402_L 1276.47,2597.53 r315 bottom
C159 "100nF 6.3V" C0402_L 1673,2418 r225 bottom
C160 "100nF 6.3V" C0402_L 1613,2478 r225 bottom
C161 "100nF 6.3V" C0402_L 759,1998 r180 top
C162 "100nF 6.3V" C0402_L 759.72,1421 r180 top
C163 "100nF 6.3V" C0402_L 588.54,1011 r180 top
C164 "100nF 6.3V" C0402_L 766,299 r180 top
CON1 "3.5*1.3" DC-012 2775.24,2329.99 r90 bottom
E1 "100uF/25V" "CS 6*4 - B" 1434,1518 r90 bottom
E2 "100uF/25V" "CS 6*4 - B" 1722.67,1518 r90 bottom
E3 "100uF/25V" "CS 6*4 - B" 2011.33,1518 r90 bottom
E4 "100uF/25V" "CS 6*4 - B" 2300,1518 r90 bottom
E5 "100uF/25V" "CS 6*4 - B" 1722.67,192 r90 bottom
E6 "100uF/25V" "CS 6*4 - B" 1434,192 r90 bottom
E7 "100uF/25V" "CS 6*4 - B" 2011.33,192 r90 bottom
E8 "100uF/25V" "CS 6*4 - B" 2300,192 r90 bottom
E9 "100uF/25V" "CS 6*4 - B" 1434,854 r90 bottom
E10 "100uF/25V" "CS 6*4 - B" 1722.67,854 r90 bottom
E11 "100uF/25V" "CS 6*4 - B" 2300,854 r90 bottom
E12 "100uF/25V" "CS 6*4 - B" 2011.33,854 r90 bottom
J1 "SATA15P" "SATA 15P 贴片" 981.9,220.06 r0 top locked
J2 "SATA15P" "SATA 15P 贴片" 981.9,882.38 r0 top locked
J3 "Typec 24p" "TypeC 24p 直立" 303,2474 r180 bottom locked
J4 "SATA15P" "SATA 15P 贴片" 981.9,1544.98 r0 top locked
J5 "SATA15P" "SATA 15P 贴片" 981.9,2207.58 r0 top locked
JP1 "HDR-1X2" ZH1.5-WS-2P 2536,1997 r135 bottom
JP2 "HDR-1X2" XH2.54-WS-2P 2728,328 r45 bottom
L1 "4.7uH" NR2520 677,2105 r90 top
L2 "4.7uH" NR2520 678.05,1530 r90 top
L3 "4.7uH" NR2520 681,965 r90 top
L4 "4.7uH" NR2520 685,405 r90 top
L5 "6.8uH" NR4020 2954.06,845.3 r270 bottom
L6 "6.8uH" NR4020 2954,1505.94 r270 bottom
L7 "1uH" NR4020 2168.94,2516 r0 bottom
L8 "2uH" NR4020 2168.94,2126 r0 bottom
LED1 "green" "LED 0805G" 2920,2515 r270 top locked
LED2 "green" LED0805_W 2920,2269.11 r90 top locked
LED3 "green" "LED 0805G" 2920,1852.67 r270 top locked
LED4 "green" LED0805_W 2920,1606.79 r90 top locked
LED5 "green" "LED 0805G" 2920,1190.35 r270 top locked
LED6 "green" LED0805_W 2920,944.46 r90 top locked
LED7 "green" "LED 0805G" 2920,528.02 r270 top locked
LED8 "green" LED0805_W 2920,282.93 r90 top locked
MR1 "MARK1.6" "Mark 1" 2613,69 r180 bottom
MR2 "MARK1.6" "Mark 1" 72,2307 r180 bottom
MR3 "MARK1.6" "Mark 1" 2806,51 r0 top
MR4 "MARK1.6" "Mark 1" 82,2408 r0 top
Q1 "AO3401" DFN8-L3.0-W3.0-P0.65_EP 2937,2116 r270 bottom
R1 "330K 1%" R0402_L 584.59,2020 r0 top
R2 "330K 1%" R0402_L 586.59,1443 r0 top
R3 "4.7K 1%" R0402_L 584.59,1936 r0 top
R4 "4.7K 1%" R0402_L 586.59,1359 r0 top
R5 "100K 1%" R0402_L 434,2259.59 r270 top
R6 "100K 1%" R0402_L 436,1682.59 r270 top
R7 "12K 1%" R0402_L 437,1829 r270 top
R8 "12K 1%" R0402_L 439,1253 r270 top
R9 "330K 1%" R0402_L 589.13,880 r0 top
R10 "330K 1%" R0402_L 592.59,321 r0 top
R11 "4.7K 1%" R0402_L 589.13,796 r0 top
R12 "4.7K 1%" R0402_L 592.59,237 r0 top
R13 "100K 1%" R0402_L 438.54,1119.59 r270 top
R14 "100K 1%" R0402_L 442,560.59 r270 top
R15 "12K 1%" R0402_L 441.09,690 r270 top
R16 "12K 1%" R0402_L 445,130 r270 top
R17 "10K 1%" R0402_L 2612.31,947.93 r0 bottom
R18 "10K 1%" R0402_L 2835,2155 r270 bottom
R19 "18.7K 1%" R0402_L 2612.06,862.5 r180 bottom
R20 "100K 1%" R0402_L 2612.06,734.36 r180 bottom
R21 "10K 1%" R0402_L 2612.06,905.21 r180 bottom
R22 "100K 1%" R0402_L 2612.06,1033.35 r180 bottom
R23 "19.1K 1%" R0402_L 2612.06,777.07 r180 bottom
R24 "10K 1%" R0402_L 2612.25,1608.57 r0 bottom
R25 "18.7K 1%" R0402_L 2612,1523.14 r180 bottom
R26 "100K 1%" R0402_L 2612,1395 r180 bottom
R27 "10K 1%" R0402_L 2612,1565.86 r180 bottom
R28 "100K 1%" R0402_L 2612,1694 r180 bottom
R29 "19.1K 1%" R0402_L 2612,1437.71 r180 bottom
R30 "100K 1%" R0402_L 2334,2563 r270 bottom
R31 "100K 1%" R0402_L 2336,2080.27 r90 bottom
R32 "130K 1%" R0402_L 2289,2563 r90 bottom
R33 "130K 1%" R0402_L 2289,2080.27 r270 bottom
R34 "390K 1%" R0402_L 2288,2470.73 r270 bottom
R35 "390K 1%" R0402_L 2288,2172.27 r90 bottom
R36 "130K 1%" R0402_L 2334,2471 r90 bottom
R37 "88,7K 1%" R0402_L 2335,2172.52 r270 bottom
R38 "10K 1%" R0402_L 871,2607.73 r270 top
R39 "10K 1%" R0402_L 828,2607.73 r270 top
R40 "4.7K 1%" R0402_L 1544.83,2124.17 r315 bottom
R41 "4.7K 1%" R0402_L 1605,2184 r315 bottom
R42 "4.7K 1%" R0402_L 1634.83,2214.17 r315 bottom
R43 "4.7K 1%" R0402_L 1423.73,2022 r0 bottom
R44 "4.7K 1%" R0402_L 1346.27,2022 r180 bottom
R45 "10K 1%" R0402_L 786,2608 r90 top
R46 "20K 1%" R0402_L 954,2404 r180 top
R47 "4.7K 1%" R0402_L 1290,2053 r225 bottom
R48 "20K 1%" R0402_L 954,2361 r180 top
R49 "12.4k 1%" R0402_L 1583,2508 r45 bottom
R50 "4.7K 1%" R0402_L 1480,2607 r225 bottom
R51 "1M 1%" R0402_L 1510,2577 r45 bottom
R52 "4.7K 1%" R0402_L 1345.27,2629 r180 bottom
R53 "10K 1%" R0402_L 1589,2629 r0 bottom
R54 "4.7K 1%" R0402_L 1423,2629 r0 bottom
R55 "4.7K 1%" R0402_L 1100.17,2420.83 r135 bottom
R56 "4.7K 1%" R0402_L 3003.5,2347.8 r180 top locked
R57 "4.7K 1%" R0402_L 3003.5,2287.82 r180 top locked
R58 "4.7K 1%" R0402_L 3003.5,1685.5 r180 top locked
R59 "4.7K 1%" R0402_L 3003.5,1625.62 r180 top locked
R60 "4.7K 1%" R0402_L 3003.5,1023 r180 top locked
R61 "4.7K 1%" R0402_L 3003.5,963.12 r180 top locked
R62 "4.7K 1%" R0402_L 3003.5,361 r180 top locked
R63 "4.7K 1%" R0402_L 3003.5,301.62 r180 top locked
R64 "10K 1%" R0402_L 1694.77,2273.84 r135 bottom
U1 "JMS578" QFN48-L6.0-W6.0-P0.4 368,2044 r270 top
U2 "JMS578" QFN48-L6.0-W6.0-P0.4 370,1467 r270 top
U3 "P25Q21H" SOP8_L 718,1838 r90 top
U4 "P25Q21H" SOP8_L 718,1266 r90 top
U5 "JMS578" QFN48-L6.0-W6.0-P0.4 372.54,904 r270 top
U6 "JMS578" QFN48-L6.0-W6.0-P0.4 376,345 r270 top
U7 "P25Q21H" SOP8_L 718,705 r90 top
U8 "P25Q21H" SOP8_L 718,144.43 r90 top
U9 "TPS54335A-QFN" VSON-10_L3.0-W3.0-P0.50-TL-EP 2768,884 r180 bottom
U10 "TPS54335A-QFN" VSON-10_L3.0-W3.0-P0.50-TL-EP 2768,1545 r180 bottom
U11 "MP9148" SOT23-8 2210,2321 r90 bottom
U12 "VL160" MQFN-28_L4.5-W3.5-P0.40-BL-EP 807,2463 r270 top
U13 "VL822 Q7" QFN-76_L9.0-W9.0-P0.40-EP6.3-TL 1384,2334 r45 bottom locked
U14 "TPD4E02B04" DIO_TPD4E02B04DQAR 624.44,2521.37 r180 top
U15 "TPD4E02B04" DIO_TPD4E02B04DQAR 624.44,2404.32 r180 top
U16 "P25Q21H" SOP8_L 1802,2107 r0 bottom
Y1 "30Mhz" "OSC 3225-4P" 189,1818 r270 top
Y2 "30Mhz" "OSC 3225-4P" 186,1252 r270 top
Y3 "30Mhz" "OSC 3225-4P" 187,692 r270 top
Y4 "30Mhz" "OSC 3225-4P" 196,131 r270 top
Y5 "25Mhz" "OSC 3225-4P" 1773.41,2564.47 r270 bottom

## Footprints (in the part's own frame and the unit in brackets; to place one, negate y for a bottom-side part, rotate by r counter-clockwise, add the part's x,y. Pads: shape width x height; smd on the part's side, far side on the other; paste and mask are expansions set on the pad)
C0402_L [mm] "贴片MLCC电容"
  rect 0.5x0.5 smd: 1(-0.45,0) 2(0.45,0)
  silkscreen extent -0.87,-0.46 0.88,0.46, body extent -0.5,-0.25 0.5,0.25, height 0.5
C0603_L [mm] "贴片MLCC电容"
  rect 0.75x0.85 smd: 1(-0.725,0) 2(0.725,0)
  silkscreen extent -1.35,-0.69 1.35,0.69, body extent -0.8,-0.4 0.8,0.4, height 0.8
"CS 6*4 - B" [mm] "直径6mm，高4mm"
  rect 2.7x1 smd: 1(3,0)
  oval 2.7x1 smd: 2(-3,0)
  silkscreen extent -3.3,-3.3 3.43,3.3, body extent -3.5,-3.15 3.5,3.15, height 4.05
DC-012 [mm] "5.5*2.1"
  rect 2.6x5 hole 0.9 slot 3.5 at 90 deg: 1(0,0)
  rect 4.5x1.8 hole 0.7 slot 2.5 at 0 deg: 2(2.25,-5)
  rect 4x1.8 hole 0.7 slot 2.5 at 0 deg: 3(4.75,-2.8)
  silkscreen extent -1.35,-6.48 8,5.33, body extent -1.11,-6.47 7.89,4.53, height 13.6
DFN8-L3.0-W3.0-P0.65_EP [mm] "DFN, 8-Leads, Body 3.05x3.05mm, Pitch 0.65mm               联系卖家 免费查找封装"
  rect 0.66x0.42 smd: 1(-1.47,-0.975) 2(-1.47,-0.325) 2(-1.47,0.325) 2(-1.47,0.975) 3(1.47,-0.975) 3(1.47,-0.325) 3(1.47,0.325) 3(1.47,0.975)
  Top Layer region: -0.5,-1.185 -0.5,1.185 1.33,1.185 1.33,-1.185
  Top Layer region: -0.32,-1.73 -0.32,1.73 0.25,1.73 0.25,-1.73
  silkscreen extent -2.47,-1.59 1.53,1.59, body extent -1.53,-1.53 1.53,1.53, height 0.8
DIO_TPD4E02B04DQAR [mm]
  rect 0.565x0.2 smd mask+0: 1(-0.417,1) 2(-0.417,0.5) 4(-0.417,-0.5) 5(-0.417,-1) 6(0.417,-1) 7(0.417,-0.5) 9(0.417,0.5) 10(0.417,1)
  rect 0.565x0.4 smd paste-1 mask+0: 3(-0.417,0) 8(0.417,0)
  silkscreen extent -1.35,-1.42 0.5,1.42, body extent -0.5,-1.25 0.5,1.25, height 0.55
LED0805_W [mil] "白色0805LED"
  rrect50% 40x50 smd: 1(-38.4,0) 2(38.4,0)
  silkscreen extent -70,-36 82,36, body extent -39,-25 39,25, height 32
"LED 0805G" [mil] "绿色0805LED"
  rect 35x50 smd: 1(-37.4,0)
  oct 35x50 smd: 2(37.4,0)
  silkscreen extent -64,-33 75,33, body extent -39,-25 39,25, height 32
"Mark 1" [mm] "光学定位点，直径1mm"
  round 1 smd paste-1 mask+0.635: Mark(0,0)
  Top Layer pour cut-out: 0,-1.143 -0.437,-1.056 -0.808,-0.808 -1.056,-0.437 -1.143,0 -1.143,0 -1.056,0.437 -0.808,0.808 -0.437,1.056 0,1.143 0,1.143 0.437,1.056 0.808,0.808 1.056,0.437 1.143,0 1.143,0 1.056,-0.437 0.808,-0.808 0.437,-1.056 0,-1.143
MQFN-28_L4.5-W3.5-P0.40-BL-EP [mm]
  rect 0.2x0.7 smd paste-100: 1(-1.8,-1.7) 2(-1.4,-1.7) 3(-1,-1.7) 4(-0.6,-1.7) 5(-0.2,-1.7) 6(0.2,-1.7) 7(0.6,-1.7) 8(1,-1.7) 9(1.4,-1.7) 10(1.8,-1.7) 15(1.8,1.7) 16(1.4,1.7) 17(1,1.7) 18(0.6,1.7) 19(0.2,1.7) 20(-0.2,1.7) 21(-0.6,1.7) 22(-1,1.7) 23(-1.4,1.7) 24(-1.8,1.7)
  rect 0.7x0.2 smd paste-100: 11(2.2,-0.6) 12(2.2,-0.2) 13(2.2,0.2) 14(2.2,0.6) 25(-2.2,0.6) 26(-2.2,0.2) 27(-2.2,-0.2) 28(-2.2,-0.6)
  rect 3x2 smd paste-100: 29(0,0)
  silkscreen extent -2.41,-1.78 2.29,1.78, body extent -2.26,-1.76 2.26,1.76, height 0.86
NR2520 [mm] "2.5mm*2.0mm*1.0mm(长*宽*高）"
  rect 0.85x2 smd: 1(-0.825,0) 2(0.825,0)
  silkscreen extent -1.52,-1.27 1.52,1.27, body extent -1.25,-1 1.25,1, height 1.1
NR4020 [mm] "4.0mm*4.0mm*2.0mm(长*宽*高）"
  rect 1.1x3.7 smd: 1(-1.5,0) 2(1.5,0)
  silkscreen extent -2.29,-2.03 2.29,2.03, body extent -2,-2 2,2, height 2.1
"OSC 3225-4P" [mm] "3.2*2.5*0.7mm(长宽高)"
  rect 1.3x1.2 smd: 1(-1.05,-0.85) 2(1.05,-0.85) 3(1.05,0.85) 4(-1.05,0.85)
  silkscreen extent -2.03,-1.75 1.91,1.65, body extent -1.6,-1.25 1.6,1.25, height 0.7
QFN48-L6.0-W6.0-P0.4 [mm] "QFN, 48-Leads, Body 6.00x6.00mm, Pitch 0.40mm, Thermal Pad 4.30x4.30mm封装库来自淘宝卖家 ID：黄晶宝石"
  oval 0.7x0.2 smd: 1(-3,2.2) 2(-3,1.8) 3(-3,1.4) 4(-3,1) 5(-3,0.6) 6(-3,0.2) 7(-3,-0.2) 8(-3,-0.6) 9(-3,-1) 10(-3,-1.4) 11(-3,-1.8) 12(-3,-2.2) 25(3,-2.2) 26(3,-1.8) 27(3,-1.4) 28(3,-1) 29(3,-0.6) 30(3,-0.2) 31(3,0.2) 32(3,0.6) 33(3,1) 34(3,1.4) 35(3,1.8) 36(3,2.2)
  oval 0.2x0.7 smd: 13(-2.2,-3) 14(-1.8,-3) 15(-1.4,-3) 16(-1,-3) 17(-0.6,-3) 18(-0.2,-3) 19(0.2,-3) 20(0.6,-3) 21(1,-3) 22(1.4,-3) 23(1.8,-3) 24(2.2,-3) 37(2.2,3) 38(1.8,3) 39(1.4,3) 40(1,3) 41(0.6,3) 42(0.2,3) 43(-0.2,3) 44(-0.6,3) 45(-1,3) 46(-1.4,3) 47(-1.8,3) 48(-2.2,3)
  rect 3.3x3.3 smd: 49(0,0)
  silkscreen extent -3.92,-3.15 3.15,3.15, body extent -3,-3 3,3, height 0.9
QFN-76_L9.0-W9.0-P0.40-EP6.3-TL [mm]
  oval 0.8x0.2 smd paste-100: 1(-4.45,3.599) 2(-4.45,3.2) 3(-4.45,2.799) 4(-4.45,2.4) 5(-4.45,1.999) 6(-4.45,1.6) 7(-4.45,1.199) 8(-4.45,0.8) 9(-4.45,0.399) 10(-4.45,0) 11(-4.45,-0.399) 12(-4.45,-0.8) 13(-4.45,-1.199) 14(-4.45,-1.6) 15(-4.45,-1.999) 16(-4.45,-2.4) 17(-4.45,-2.799) 18(-4.45,-3.2) 19(-4.45,-3.599) 39(4.45,-3.599) 40(4.45,-3.2) 41(4.45,-2.799) 42(4.45,-2.4) 43(4.45,-1.999) 44(4.45,-1.6) 45(4.45,-1.199) 46(4.45,-0.8) 47(4.45,-0.399) 48(4.45,0) 49(4.45,0.399) 50(4.45,0.8) 51(4.45,1.199) 52(4.45,1.6) 53(4.45,1.999) 54(4.45,2.4) 55(4.45,2.799) 56(4.45,3.2) 57(4.45,3.599)
  oval 0.2x0.8 smd paste-100: 20(-3.599,-4.45) 21(-3.2,-4.45) 22(-2.799,-4.45) 23(-2.4,-4.45) 24(-1.999,-4.45) 25(-1.6,-4.45) 26(-1.199,-4.45) 27(-0.8,-4.45) 28(-0.399,-4.45) 29(0,-4.45) 30(0.399,-4.45) 31(0.8,-4.45) 32(1.199,-4.45) 33(1.6,-4.45) 34(1.999,-4.45) 35(2.4,-4.45) 36(2.799,-4.45) 37(3.2,-4.45) 38(3.599,-4.45) 58(3.599,4.45) 59(3.2,4.45) 60(2.799,4.45) 61(2.4,4.45) 62(1.999,4.45) 63(1.6,4.45) 64(1.199,4.45) 65(0.8,4.45) 66(0.399,4.45) 67(0,4.45) 68(-0.399,4.45) 69(-0.8,4.45) 70(-1.199,4.45) 71(-1.6,4.45) 72(-1.999,4.45) 73(-2.4,4.45) 74(-2.799,4.45) 75(-3.2,4.45) 76(-3.599,4.45)
  rect 5.5x5.5 smd paste-100: 77(0,0)
  silkscreen extent -5.36,-4.7 4.7,4.7, body extent -4.5,-4.5 4.5,4.5, height 0.85
R0402_L [mm] "1/16W贴片电阻"
  rect 0.5x0.5 smd: 1(-0.425,0) 2(0.425,0)
  silkscreen extent -0.88,-0.46 0.87,0.46, body extent -0.5,-0.25 0.5,0.25, height 0.3
"SATA 15P 贴片" [mm] "SATA"
  rect 0.6x2.9 smd: P1(16.99,1.5) P2(18.26,1.5) P3(19.53,1.5) P4(20.8,1.5) P5(22.07,1.5) P6(23.34,1.5) P7(24.61,1.5) P8(25.88,1.5) P9(27.15,1.5) P10(28.42,1.5) P11(29.69,1.5) P12(30.96,1.5) P13(32.23,1.5) P14(33.5,1.5) P15(34.77,1.5) S1(3.02,1.5) S2(4.29,1.5) S3(5.56,1.5) S4(6.83,1.5) S5(8.1,1.5) S6(9.37,1.5) S7(10.64,1.5)
  rect 2.4x2.8 smd: SH1(-3.19,0) SH2(40.75,0)
  round 1 hole 1.2 unplated: ""(0,0) ""(38,0)
  body extent -3.97,-2.88 41.47,2.67, height 10.2
SOP8_L [mm] "4*5*1.8mm（长宽高）"
  rect 1.5x0.5 smd: 1(-2.5,1.905)
  oval 1.5x0.5 smd: 2(-2.5,0.635) 3(-2.5,-0.635) 4(-2.5,-1.905) 5(2.5,-1.905) 6(2.5,-0.635) 7(2.5,0.635) 8(2.5,1.905)
  silkscreen extent -2.69,-2.5 1.52,3.2, body extent -3,-2.5 3,2.5, height 1.9
SOT23-8 [mil] "SOT23, 8-Leads, Body 2.9x1.75mm, Pitch 0.65mm  联系卖家 免费查找封装"
  rect 38.5x17 smd paste+0: 1(-53.75,38.39) 2(-53.75,12.8) 3(-53.75,-12.8) 4(-53.75,-38.39) 5(53.75,-38.39) 6(53.75,-12.8) 7(53.75,12.8) 8(53.75,38.39)
  silkscreen extent -70,-61 20,70, body extent -55,-59 55,59, height 47
"TypeC 24p 直立" [mm]
  rect 0.3x1 smd paste-100: A1(-2.75,0.72) A2(-2.25,0.72) A3(-1.75,0.72) A4(-1.25,0.72) A5(-0.75,0.72) A6(-0.25,0.72) A7(0.25,0.72) A8(0.75,0.72) A9(1.25,0.72) A10(1.75,0.72) A11(2.25,0.72) A12(2.75,0.72) B1(2.75,-0.72) B2(2.25,-0.72) B3(1.75,-0.72) B4(1.25,-0.72) B5(0.75,-0.72) B6(0.25,-0.72) B7(-0.25,-0.72) B8(-0.75,-0.72) B9(-1.25,-0.72) B10(-1.75,-0.72) B11(-2.25,-0.72) B12(-2.75,-0.72)
  round 1.3 hole 0.7: SH1(-2.4,-2.15) SH2(2.4,-2.15) SH3(2.4,2.15) SH4(-2.4,2.15)
  Keep-Out Layer board cut-out: -3.42,0 -3.42,-0.066 -3.47,-0.187 -3.563,-0.28 -3.684,-0.33 -3.816,-0.33 -3.937,-0.28 -4.03,-0.187 -4.08,-0.066 -4.08,0 -4.08,0.066 -4.03,0.187 -3.937,0.28 -3.816,0.33 -3.684,0.33 -3.563,0.28 -3.47,0.187 -3.42,0.066 -3.42,0 -3.42,0
  Keep-Out Layer board cut-out: 4.244,0 4.244,-0.056 4.203,-0.16 4.126,-0.241 4.024,-0.287 3.968,-0.29 3.968,-0.29 3.556,-0.29 3.499,-0.289 3.393,-0.245 3.312,-0.163 3.268,-0.057 3.268,0 3.268,0.058 3.312,0.164 3.393,0.245 3.499,0.29 3.556,0.29 3.556,0.29 3.97,0.29 4.026,0.287 4.127,0.24 4.203,0.159 4.244,0.056 4.244,0 4.244,0
  Keep-Out Layer circle w0.005: c-3.75,0 r0.33
  Keep-Out Layer region: -3.42,0 -3.42,-0.066 -3.47,-0.187 -3.563,-0.28 -3.684,-0.33 -3.816,-0.33 -3.937,-0.28 -4.03,-0.187 -4.08,-0.066 -4.08,0 -4.08,0.066 -4.03,0.187 -3.937,0.28 -3.816,0.33 -3.684,0.33 -3.563,0.28 -3.47,0.187 -3.42,0.066 -3.42,0 -3.42,0
  Keep-Out Layer region: 4.244,0 4.244,-0.056 4.203,-0.16 4.126,-0.241 4.024,-0.287 3.968,-0.29 3.968,-0.29 3.556,-0.29 3.499,-0.289 3.393,-0.245 3.312,-0.163 3.268,-0.057 3.268,0 3.268,0.058 3.312,0.164 3.393,0.245 3.499,0.29 3.556,0.29 3.556,0.29 3.97,0.29 4.026,0.287 4.127,0.24 4.203,0.159 4.244,0.056 4.244,0 4.244,0
  Keep-Out Layer lines w0.005: 4.244,0 ccw(c3.954,0) 3.97,0.29 3.556,0.29 ccw(c3.558,0) 3.268,0 ccw(c3.558,0) 3.556,-0.29 3.968,-0.29 ccw(c3.954,0) 4.244,0
  silkscreen extent -5,-2 5,2, body extent -4.47,-2.3 4.47,2.3, height 9.2
VSON-10_L3.0-W3.0-P0.50-TL-EP [mm]
  rect 0.8x0.3 smd: 1(-1.5,1) 2(-1.5,0.5) 3(-1.5,0) 4(-1.5,-0.5) 5(-1.5,-1) 6(1.5,-1) 7(1.5,-0.5) 8(1.5,0) 9(1.5,0.5) 10(1.5,1)
  round 0.304 smd: 11(0.002,-0.009)
  Top Layer region: -0.758,1.191 -0.398,1.191 -0.398,1.706 -0.098,1.706 -0.098,1.191 0.102,1.191 0.102,1.706 0.402,1.706 0.402,1.191 0.761,1.191 0.761,-1.209 0.402,-1.209 0.402,-1.714 0.102,-1.714 0.102,-1.209 -0.098,-1.209 -0.098,-1.714 -0.398,-1.714 -0.398,-1.209 -0.759,-1.209 -0.759,0.886 -0.758,0.886 -0.758,1.191
  silkscreen extent -1.98,-1.5 1.5,1.6, body extent -1.51,-1.52 1.51,1.5, height 0.61
XH2.54-WS-2P [mm] "长：10mm，宽：8mm，高：6.1mm"
  rect 2x3.5 smd: 0(-4.327,-2.15) 0(4.327,-2.15)
  rect 1.2x3.5 smd: 1(-1.25,4.981) 2(1.25,4.981)
  silkscreen extent -5,-4.06 5,4.06, body extent -5,-4 5,6.42, height 6.05
ZH1.5-WS-2P [mm] "长：6.1mm，宽：2.5mm，高：3.7mm"
  rect 1.5x1.95 smd: 0(-2.818,0) 0(2.818,0)
  rect 0.8x2.5 smd: 1(-0.75,4.05) 2(0.75,4.05)
  silkscreen extent -3.05,-2 3.03,4.06, body extent -3.05,-2 3.05,4.6, height 3.75

## Part data
C1 C2 C3 C4 C5 C6 C7 C8 C9 C10 C11 C12 C13 C14 C15 C16 C17 C18 C19 C20 C21 C22 C23 C24 C25 C26 C27 C28 C29 C30 C31 C32 C33 C34 C35 C36 C37 C38 C39 C40 C41 C42 C43 C44 C45 C46 C47 C48 C49 C50 C51 C52 C53 C54 C55 C56 C57 C58 C59 C60 C61 C62 C63 C64 C65 C66 C67 C68 C69 C70 C71 C72 C73 C74 C75 C76 C77 C78 C79 C80 C81 C82 C83 C84 C85 C86 C87 C88 C89 C90 C91 C92 C93 C94 C95 C96 C97 C98 C99 C100 C101 C102 C103 C104 C105 C106 C107 C108 C109 C110 C111 C112 C113 C114 C115 C116 C117 C118 C119 C120 C121 C122 C123 C124 C125 C126 C127 C128 C129 C130 C131 C132 C133 C134 C135 C136 C137 C138 C139 C140 C141 C142 C143 C144 C145 C146 C147 C148 C149 C150 C151 C152 C153 C154 C155 C156 C157 C158 C159 C160 C161 C162 C163 C164: library part C, "无极性贴片电容", BOM名称=无极性贴片电容, 学习资源=www.ooocke.com, 材质=X7R, 版权归属=源创客
CON1: library part P-DC, "低压电源接口", BOM名称=DC电源接口, 学习资源=www.ooocke.com, 版权归属=源创客
E1 E2 E3 E4 E5 E6 E7 E8 E9 E10 E11 E12: library part C-CD, "贴片钽电容", BOM名称=贴片钽电容, 学习资源=www.ooocke.com, 版权归属=源创客
J3: "USB-C (USB TYPE-C) USB 3.2 Gen 2 (USB 3.1 Gen 2, Superspeed + (USB 3.1)) Receptacle Connector 24 Position Surface Mount, Right Angle; Through Hole", Package=None, Check_prices=https://www.snapeda.com/parts/1054500101/Molex/view-part/?ref=eda, MF=Molex, MP=1054500101, SnapEDA_Link=https://www.snapeda.com/parts/1054500101/Molex/view-part/?ref=snap
JP1 JP2: library part "Header 2", "2P接插件", BOM名称=2P接插件, 学习资源=www.ooocke.com, 版权归属=源创客
L1 L2 L3 L4 L5 L6 L7 L8: library part L, "小功率贴片电感", BOM名称=小功率贴片电感, 学习资源=www.ooocke.com, 版权归属=源创客
LED1 LED2 LED3 LED4 LED5 LED6 LED7 LED8: library part LED-3MM, "插件LED", BOM名称=插件LED, 学习资源=www.ooocke.com, 版权归属=源创客
MR1 MR2 MR3 MR4: library part MARK, "光学定位点", BOM名称=光学定位点, 学习资源=www.ooocke.com, 版权归属=源创客
Q1: "P沟道 30V/4.2A", BOM名称=场效应管, 学习资源=www.ooocke.com, 描述="P沟道 30V/4.2A", 版权归属=源创客
R1 R2 R3 R4 R5 R6 R7 R8 R9 R10 R11 R12 R13 R14 R15 R16 R17 R18 R19 R20 R21 R22 R23 R24 R25 R26 R27 R28 R29 R30 R31 R32 R33 R34 R35 R36 R37 R38 R39 R40 R41 R42 R43 R44 R45 R46 R47 R48 R49 R50 R51 R52 R53 R54 R55 R56 R57 R58 R59 R60 R61 R62 R63 R64: library part R, "贴片电阻", BOM名称=贴片电阻, 学习资源=www.ooocke.com, 版权归属=源创客
U3 U4 U7 U8 U16: library part P25D40H
U9 U10 U11: "BUCK"
U14 U15: "ESD"
Y1 Y2 Y3 Y4 Y5: library part Crystal

## Via types
v1: diameter 15.75, hole 11.81, Top Layer to Bottom Layer, tented both sides, 581 vias

## Nets (pads, with @x,y where several pads share a name; then routed paths per layer and width w, separated by ;. In a path a pad name is that pad's centre, name@x,y a point inside that pad or via, vN(x,y) a via of type N, cw(c..) or ccw(c..) an arc to the next point about the centre after c; other vN are vias at no path point)
cap_IN_SSRX1_N: U12.7 U15.4 | length 106.5
  Top Layer w5.15: U15.4@640.87,2424 647.02,2424 ccw(c647.02,2426.51) 648.79,2424.73 ccw(c647.28,2426.25) 649.42,2426.25 650.93,2427.76 cw(c654.57,2424.12) 654.57,2429.27 683.33,2429.27 ccw(c683.33,2438.29) 689.71,2431.91 693.77,2435.97 cw(c709.94,2419.79) 695.64,2437.65 cw(c709.94,2419.79) 709.94,2442.67 724.59,2442.67 cw(c724.59,2437.04) 728.58,2441.02 ccw(c732.56,2445) 732.56,2439.37 U12.7@740.07,2439.37
cap_IN_SSRX1_P: U12.6 U15.5 | length 105.9
  Top Layer w5.15: U15.5@640.87,2443.69 647.02,2443.69 cw(c647.02,2441.18) 648.79,2442.95 cw(c647.28,2441.43) 649.42,2441.43 650.93,2439.93 ccw(c654.57,2443.57) 654.57,2438.42 673.8,2438.42 ccw(c673.8,2461.3) 689.98,2445.12 cw(c706.15,2428.94) 691.85,2446.8 cw(c706.15,2428.94) 706.15,2451.82 724.59,2451.82 ccw(c724.59,2457.45) 728.58,2453.47 cw(c732.56,2449.49) 732.56,2455.12 U12.6@740.07,2455.12
cap_IN_SSRX2_N: U12.8 U15.2 | length 116.8
  Top Layer w5.15: U15.2@640.87,2384.63 647.02,2384.63 cw(c647.02,2382.12) 648.79,2383.9 cw(c647.28,2382.38) 649.42,2382.38 650.93,2380.87 ccw(c654.57,2384.51) 654.57,2379.36 659.27,2379.36 ccw(c659.27,2395.85) 670.92,2384.18 694.73,2408 cw(c724.5,2378.22) 710.38,2417.89 cw(c724.5,2378.22) 724.5,2420.33 724.59,2420.33 ccw(c724.59,2425.96) 728.58,2421.98 cw(c732.56,2418) 732.56,2423.63 U12.8@740.07,2423.63
cap_IN_SSRX2_P: U12.9 U15.1 | length 117
  Top Layer w5.15: U15.1@640.87,2364.94 647.02,2364.94 ccw(c647.02,2367.45) 648.79,2365.68 ccw(c647.28,2367.2) 649.42,2367.2 650.93,2368.7 cw(c654.57,2365.06) 654.57,2370.21 661.16,2370.21 ccw(c661.16,2391.27) 676.05,2376.38 701.13,2401.46 cw(c724.59,2378) 715.27,2409.84 cw(c724.59,2378) 724.59,2411.18 cw(c724.59,2405.55) 728.58,2409.53 ccw(c732.56,2413.51) 732.56,2407.88 U12.9@740.07,2407.88
cap_IN_SSTX1_N: U12.3 U14.4 | length 116.9
  Top Layer w5.15: U14.4@640.87,2541.06 647.02,2541.06 ccw(c647.02,2543.56) 648.79,2541.79 ccw(c647.28,2543.31) 649.42,2543.31 650.93,2544.81 cw(c654.57,2541.17) 654.57,2546.32 662.02,2546.32 cw(c662.02,2523.18) 678.38,2539.55 703.6,2514.33 ; 703.63,2514.31 ccw(c724.53,2535.26) 724.53,2505.66 724.6,2505.66 cw(c724.6,2500.04) U12.3@728.57,2504.02 ; U12.3@728.59,2504.01 ccw(c732.56,2507.99) 732.56,2502.37 U12.3@740.07,2502.37
cap_IN_SSTX1_P: U12.2 U14.5 | length 117.1
  Top Layer w5.15: U14.5@640.87,2560.74 647.02,2560.74 cw(c647.02,2558.24) 648.79,2560.01 cw(c647.28,2558.49) 649.42,2558.49 650.93,2556.98 ccw(c654.57,2560.62) 654.57,2555.47 663.92,2555.47 cw(c663.92,2527.76) 683.52,2547.35 710.01,2520.86 ccw(c724.6,2535.45) 724.6,2514.81 ccw(c724.6,2520.44) U12.2@728.57,2516.46 ; U12.2@728.59,2516.47 cw(c732.56,2512.49) 732.56,2518.11 U12.2@740.07,2518.11
cap_IN_SSTX2_N: U12.4 U14.2 | length 105.9
  Top Layer w5.15: U14.2@640.87,2501.69 647.02,2501.69 cw(c647.02,2499.18) 648.79,2500.95 cw(c647.28,2499.43) 649.42,2499.43 650.93,2497.93 ccw(c654.57,2501.57) 654.57,2496.42 677.95,2496.42 cw(c677.95,2474.06) 693.77,2489.87 ccw(c709.58,2505.68) 695.62,2488.21 ccw(c709.58,2505.68) 709.58,2483.32 724.59,2483.32 ccw(c724.59,2488.95) 728.58,2484.97 cw(c732.56,2480.99) 732.56,2486.62 U12.4@740.07,2486.62
cap_IN_SSTX2_P: U12.5 U14.1 | length 105.9
  Top Layer w5.15: U14.1@640.87,2482 647.02,2482 ccw(c647.02,2484.5) 648.79,2482.73 ccw(c647.28,2484.25) 649.42,2484.25 650.93,2485.76 cw(c654.57,2482.12) 654.57,2487.27 674.16,2487.27 cw(c674.16,2464.91) 689.98,2480.72 ccw(c705.79,2496.53) 691.83,2479.06 ccw(c705.79,2496.53) 705.79,2474.17 724.59,2474.17 cw(c724.59,2468.54) 728.58,2472.52 ccw(c732.56,2476.5) 732.56,2470.87 U12.5@740.07,2470.87
cap_RX1_N: C5.1 J1.S5 | length 597.8
  Top Layer w4.29: C5.1@963.72,63 969.42,57.3 cw(c964.6,52.48) 971.41,52.48 971.41,51.44 ccw(c975.7,51.44) 972.67,48.4 ccw(c975.7,51.44) 975.7,47.14 1006,47.15 1021,47.15 1031,57.15 1046,57.15 1056.43,46.72 1071.43,46.72 1081.86,57.15 1096.86,57.15 1106.86,47.15 1148,47.15 1251.13,47.15 ccw(c1251.13,122.03) 1304.08,69.08 ccw(c1264.06,109.1) 1320.66,109.1 1320.66,254.97 ccw(c1316.37,254.97) 1319.4,258 ccw(c1316.37,254.97) 1316.37,259.26 cw(c1316.37,273.5) 1306.3,263.43 cw(c1319.56,276.7) 1302.51,268.87 cw(c1319.56,276.7) 1300.8,276.7 J1.S5@1300.8,279.12
cap_RX1_P: C7.1 J1.S6 | length 597
  Top Layer w4.29: C7.1@963.72,21 969.42,26.7 ccw(c964.6,31.52) 971.41,31.52 971.41,32.56 cw(c975.7,32.56) 972.67,35.6 cw(c975.7,32.56) 975.7,36.86 1251.26,36.85 ccw(c1251.26,121.71) 1311.26,61.71 1311.38,61.83 ccw(c1264.15,109.06) 1311.43,61.87 ccw(c1264.15,109.06) 1330.95,109.06 1330.95,254.97 cw(c1335.24,254.97) 1332.2,258 cw(c1335.24,254.97) 1335.24,259.26 ccw(c1335.24,273.5) 1345.31,263.43 ccw(c1332.04,276.7) 1349.09,268.87 ccw(c1332.04,276.7) 1350.8,276.7 J1.S6@1350.8,279.12
cap_RX2_N: C6.1 J2.S5 | length 586.6
  Top Layer w4.29: C6.1@963.72,726 968.68,721.04 cw(c962.08,714.44) 971.41,714.44 ccw(c975.71,714.44) 972.67,711.4 ccw(c975.7,714.43) 975.7,710.14 995,710.14 1010,710.14 1020,720.14 1035,720.14 1045.43,709.72 1060.43,709.72 1070.86,720.14 1085.86,720.14 1095.86,710.14 1122,710.14 1230.07,710.14 ccw(c1230.07,800.73) 1294.09,736.64 ; 1294.14,736.69 ccw(c1230.07,800.73) 1320.66,800.73 1320.66,917.29 ccw(c1316.37,917.29) 1319.4,920.33 ccw(c1316.37,917.29) 1316.37,921.58 1314.31,921.58 cw(c1314.31,930.85) 1307.75,924.3 1305.63,926.42 cw(c1317.3,938.08) 1300.8,938.08 J2.S5@1300.8,941.44
cap_RX2_P: C8.1 J2.S6 | length 586.3
  Top Layer w4.29: C8.1@963.72,684 968.68,688.96 ccw(c962.08,695.56) 971.41,695.56 cw(c975.71,695.56) 972.67,698.6 cw(c975.7,695.57) 975.7,699.86 1230.12,699.86 ccw(c1230.12,800.6) 1301.36,729.36 1304.41,732.41 ; 1304.43,732.43 ccw(c1240.36,796.47) 1330.95,796.47 1330.95,917.29 cw(c1335.24,917.29) 1332.2,920.33 cw(c1335.24,917.29) 1335.24,921.58 1337.3,921.58 ccw(c1337.3,930.85) 1343.85,924.3 1345.97,926.42 ccw(c1334.3,938.08) 1350.8,938.08 J2.S6@1350.8,941.44
cap_RX3_N: C13.1 J4.S5 | length 589.1
  Top Layer w4.29: C13.1@962.72,1388 968.42,1382.3 cw(c963.6,1377.48) 970.41,1377.48 970.41,1376.44 ccw(c974.7,1376.44) 971.67,1373.4 ccw(c974.7,1376.44) 974.7,1372.15 1009,1372.14 1024,1372.14 1034,1382.14 1049,1382.14 1059.43,1371.72 1074.43,1371.72 1084.86,1382.14 1099.86,1382.14 1109.86,1372.14 1137,1372.14 1231.78,1372.14 ccw(c1231.78,1461.02) 1294.59,1398.15 ; 1294.63,1398.18 ccw(c1231.78,1461.02) 1320.66,1461.02 1320.66,1579.89 ccw(c1316.37,1579.89) 1319.4,1582.92 ; J4.S5@1300.8,1604.04 1300.8,1600.68 ccw(c1317.3,1600.68) 1305.63,1589.02 1307.75,1586.9 ccw(c1314.31,1593.45) 1314.31,1584.18 1316.37,1584.18 cw(c1316.37,1579.89) 1319.4,1582.93
cap_RX3_P: C15.1 J4.S6 | length 588.8
  Top Layer w4.29: C15.1@962.72,1346 968.42,1351.7 ccw(c963.6,1356.52) 970.41,1356.52 970.41,1357.56 cw(c974.7,1357.56) 971.67,1360.6 cw(c974.7,1357.56) 973.99,1361.8 cw(c974.7,1357.56) 974.7,1361.85 1231.82,1361.86 ccw(c1231.82,1460.93) 1301.87,1390.87 1304.92,1393.92 ccw(c1242.07,1456.76) 1330.95,1456.76 1330.95,1579.89 cw(c1335.24,1579.89) 1332.2,1582.92 ; 1332.2,1582.93 cw(c1335.24,1579.89) 1335.24,1584.18 1337.3,1584.18 ccw(c1337.3,1593.45) 1343.85,1586.9 1345.97,1589.02 ccw(c1334.3,1600.68) 1350.8,1600.68 J4.S6@1350.8,1604.04
cap_RX4_N: C14.1 J5.S5 | length 579.3
  Top Layer w4.29: C14.1@968,2055 972.96,2050.04 cw(c966.36,2043.44) 973.61,2049.32 cw(c966.36,2043.44) 975.7,2043.44 ccw(c979.99,2043.44) 976.95,2040.4 ccw(c979.99,2043.43) 979.99,2039.14 997,2039.14 1012,2039.14 1023,2050.14 1038,2050.14 1049,2039.14 1082,2039.14 1247.24,2039.14 ccw(c1247.24,2113.76) 1299.97,2060.97 ; 1300,2061 1305.56,2066.56 ccw(c1269.13,2103) 1320.66,2103 1320.66,2242.49 ccw(c1316.37,2242.49) 1319.4,2245.52 ccw(c1316.37,2242.49) 1316.37,2246.78 1314.31,2246.78 cw(c1314.31,2256.05) 1307.75,2249.49 1305.63,2251.61 cw(c1317.3,2263.28) 1300.8,2263.28 J5.S5@1300.8,2266.64
cap_RX4_P: C16.1 J5.S6 | length 586.3
  Top Layer w4.29: C16.1@968,2013 972.96,2017.96 ccw(c966.36,2024.56) 973.61,2018.68 ccw(c966.36,2024.56) 975.7,2024.56 cw(c979.99,2024.56) 976.95,2027.6 cw(c979.99,2024.57) 979.99,2028.86 1247.29,2028.86 ccw(c1247.29,2113.63) 1307.24,2053.69 1312.88,2059.33 ccw(c1269.28,2102.94) 1330.95,2102.94 1330.95,2242.49 cw(c1335.24,2242.49) 1332.2,2245.52 cw(c1335.24,2242.49) 1335.24,2246.78 1337.3,2246.78 ccw(c1337.3,2256.05) 1343.85,2249.49 1345.97,2251.61 ccw(c1334.3,2263.28) 1350.8,2263.28 J5.S6@1350.8,2266.64
cap_SSRX1_N: C94.2 U6.19 | length 96
  Top Layer w5.15: C94.2@177.72,369 182.15,364.57 cw(c175.31,357.73) 184.98,357.73 ccw(c190.13,357.73) 186.48,354.09 ccw(c190.13,357.73) 190.13,352.58 199.64,352.57 cw(c199.64,324.48) 219.49,344.36 221.79,342.07 ccw(c241.68,361.96) 241.68,333.83 ccw(c241.68,339.46) U6.19@245.65,335.47 ; U6.19@245.67,335.49 cw(c249.64,331.49) 249.64,337.13 U6.19@257.89,337.13
cap_SSRX1_P: C96.2 U6.20 | length 97
  Top Layer w5.15: C96.2@177.72,327 182.15,331.43 ccw(c175.31,338.27) 184.98,338.27 cw(c190.13,338.27) 186.48,341.91 cw(c190.13,338.27) 190.13,343.42 197.74,343.43 cw(c197.74,319.9) 214.38,336.54 223.57,327.34 ; 223.61,327.31 ccw(c230,333.76) 230,324.68 241.68,324.68 cw(c241.68,319.05) U6.20@245.65,323.04 ; U6.20@245.67,323.02 ccw(c249.64,327.01) 249.64,321.38 U6.20@257.89,321.38
cap_SSRX2_N: C93.2 U5.19 | length 96
  Top Layer w5.15: C93.2@174.26,928 178.69,923.57 cw(c171.85,916.73) 181.53,916.73 ccw(c186.68,916.73) 183.04,913.08 ccw(c186.68,916.73) 186.68,911.58 196.18,911.58 cw(c196.18,883.48) 216.05,903.35 218.33,901.07 ccw(c238.22,920.96) 238.22,892.83 ccw(c238.22,898.46) 242.2,894.48 cw(c246.19,890.49) 246.19,896.13 U5.19@254.43,896.13
cap_SSRX2_P: C95.2 U5.20 | length 96
  Top Layer w5.15: C95.2@174.26,886 178.69,890.43 ccw(c171.85,897.27) 181.53,897.27 cw(c186.68,897.27) 183.04,900.92 cw(c186.68,897.27) 184,901.68 cw(c186.68,897.27) 186.68,902.42 194.29,902.42 cw(c194.29,878.9) 210.92,895.54 213.4,893.05 ccw(c236.04,915.68) 236.04,883.68 238.22,883.68 cw(c238.22,878.05) 242.2,882.03 ccw(c246.19,886.01) 246.19,880.38 U5.20@254.43,880.38
cap_SSRX3_N: C52.2 U2.19 | length 96
  Top Layer w5.15: C52.2@171.72,1491 176.15,1486.57 cw(c169.31,1479.73) 178.98,1479.73 ccw(c184.13,1479.73) 180.49,1476.08 ccw(c184.13,1479.72) 184.13,1474.57 ; 184.13,1474.58 193.64,1474.58 ; 193.64,1474.57 cw(c193.64,1446.48) 213.51,1466.35 215.79,1464.07 ccw(c235.68,1483.96) 235.68,1455.83 ccw(c235.68,1461.46) 239.66,1457.48 cw(c243.64,1453.49) 243.64,1459.13 U2.19@251.89,1459.13
cap_SSRX3_P: C54.2 U2.20 | length 96
  Top Layer w5.15: C54.2@171.72,1449 176.15,1453.43 ccw(c169.31,1460.27) 178.98,1460.27 cw(c184.13,1460.27) 179.61,1462.74 cw(c184.13,1460.27) 180.49,1463.92 cw(c184.13,1460.28) 184.13,1465.43 ; 184.13,1465.42 191.74,1465.42 ; 191.74,1465.43 cw(c191.74,1441.9) 208.38,1458.54 210.86,1456.05 ccw(c233.49,1478.68) 233.49,1446.68 235.68,1446.68 cw(c235.68,1441.05) 239.66,1445.03 ccw(c243.64,1449.01) 243.64,1443.38 U2.20@251.89,1443.38
cap_SSRX4_N: C51.2 U1.19 | length 96
  Top Layer w5.15: C51.2@169.72,2068 174.15,2063.57 cw(c167.31,2056.73) 176.98,2056.73 ccw(c182.13,2056.73) 178.48,2053.09 ccw(c182.13,2056.72) 182.13,2051.57 191.64,2051.57 cw(c191.64,2023.48) 211.49,2043.36 213.79,2041.07 ccw(c233.68,2060.96) 233.68,2032.83 ccw(c233.68,2038.46) U1.19@237.65,2034.47 ; U1.19@237.67,2034.49 cw(c241.64,2030.49) 241.64,2036.13 U1.19@249.89,2036.13
cap_SSRX4_P: C53.2 U1.20 | length 96
  Top Layer w5.15: C53.2@169.72,2026 174.15,2030.43 ccw(c167.31,2037.27) 176.98,2037.27 cw(c182.13,2037.27) 178.48,2040.91 cw(c182.13,2037.28) 182.13,2042.43 189.74,2042.42 cw(c189.74,2018.9) 206.38,2035.54 208.86,2033.05 ; 208.88,2033.03 ccw(c231.49,2055.68) 231.49,2023.68 233.68,2023.68 cw(c233.68,2018.05) U1.20@237.65,2022.04 ; U1.20@237.67,2022.02 ccw(c241.64,2026.01) 241.64,2020.38 U1.20@249.89,2020.38
cap_SSTX1_N: C133.2 U13.4 | length 199.4
  Bottom Layer w5.15: C133.2@1179.43,2060 1183.56,2055.88 cw(c1175.96,2048.28) 1186.7,2048.28 ccw(c1191.85,2048.28) 1188.2,2044.65 ccw(c1191.85,2048.28) 1191.85,2043.13 1201.43,2043.13 1201.49,2043.08 1214,2043.08 ccw(c1214,2084.96) 1243.62,2055.34 1316.43,2128.15 ccw(c1312.47,2132.1) 1318.06,2132.1 cw(c1323.65,2132.1) 1319.7,2136.06 U13.4@1326.94,2143.29